# Altium PCB PSoC6-Cardiac-PCB.PcbDoc (part 1 of 2)
Units mil, origin at the board's own origin, x right, y up, seen from the top; angles counter-clockwise.
Board outline 1456 x 1820 mil, 4 copper layers (Top Layer, Layer 1, Layer 2, Bottom Layer), stack 41.656 mil thick; 58 components, 40 nets, 282 pads, 88 vias.
Unrouted connection lines stored in the file: 6.
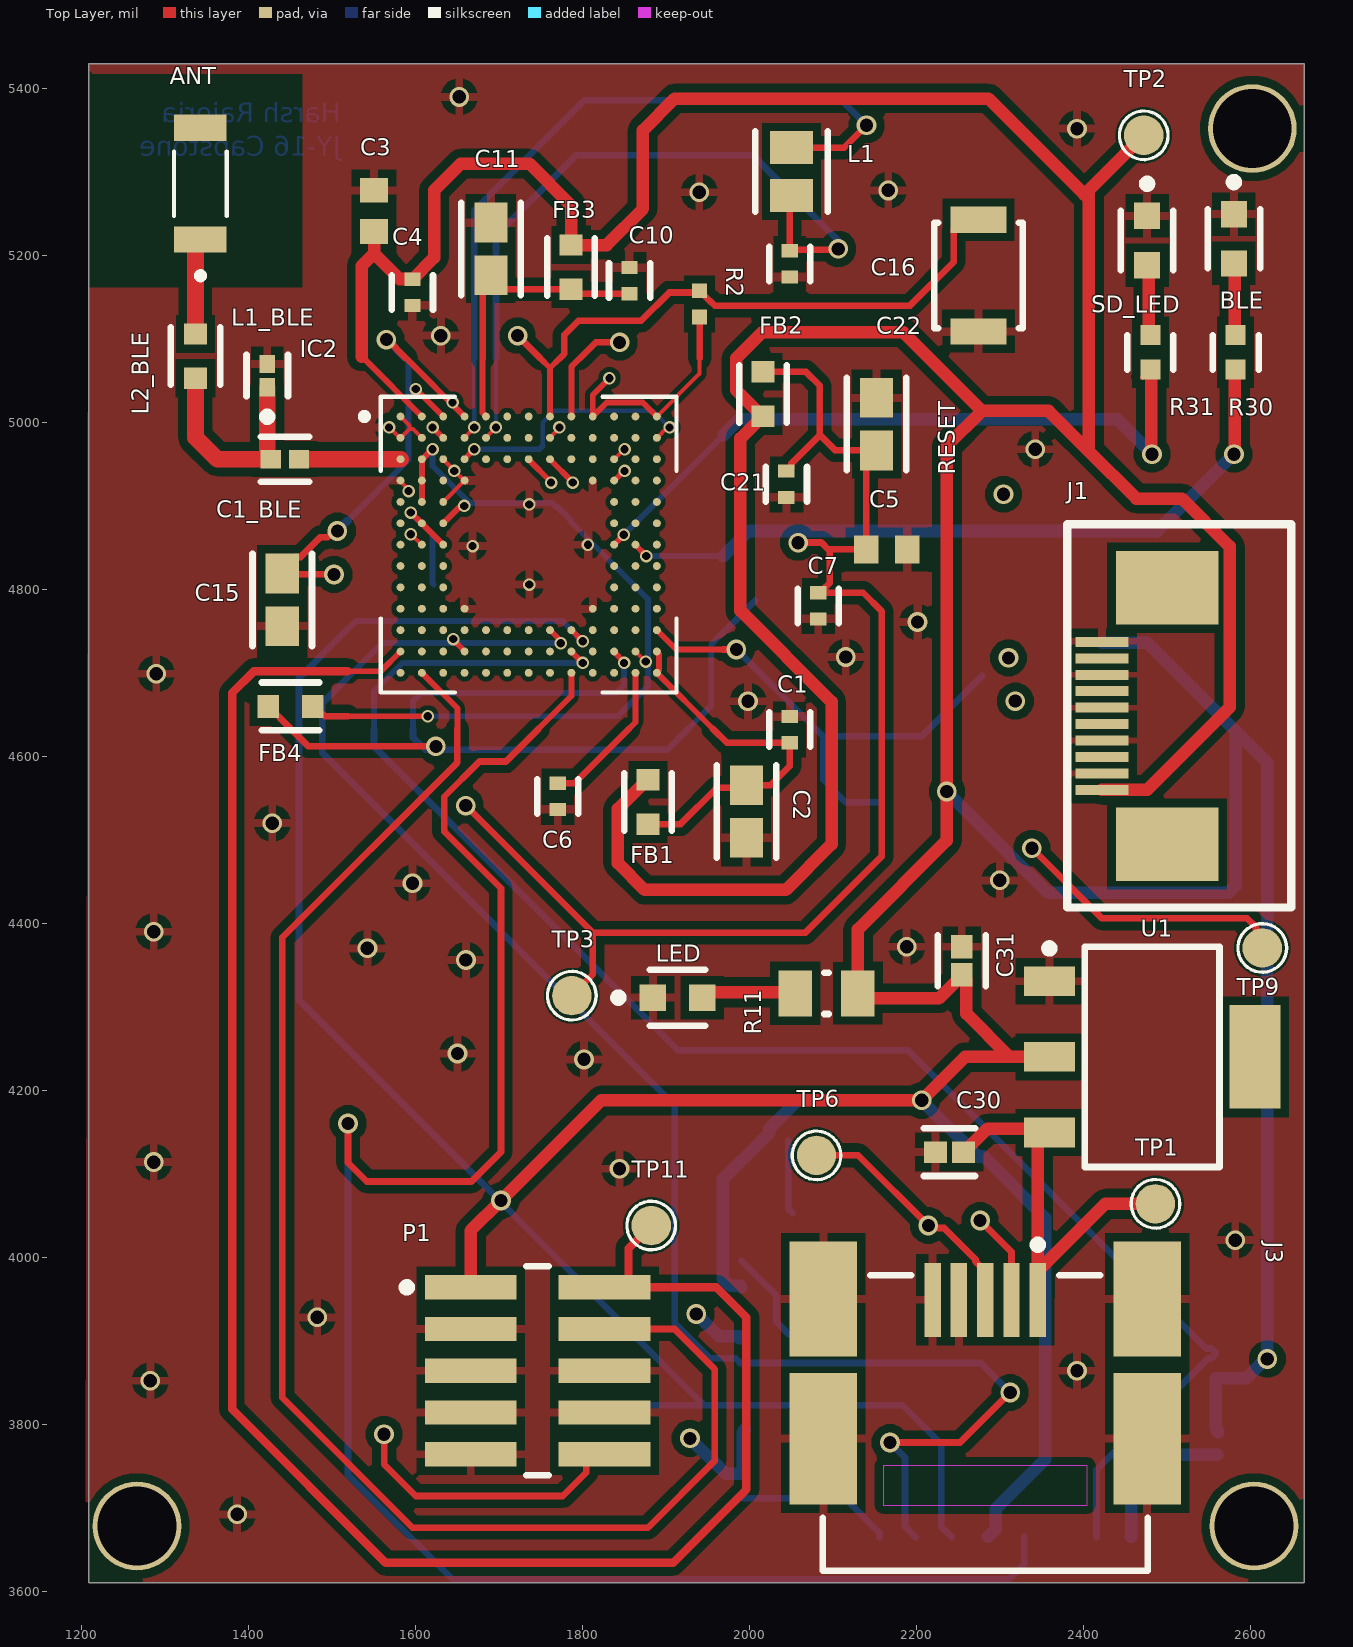
[diagram p0: Top Layer view]
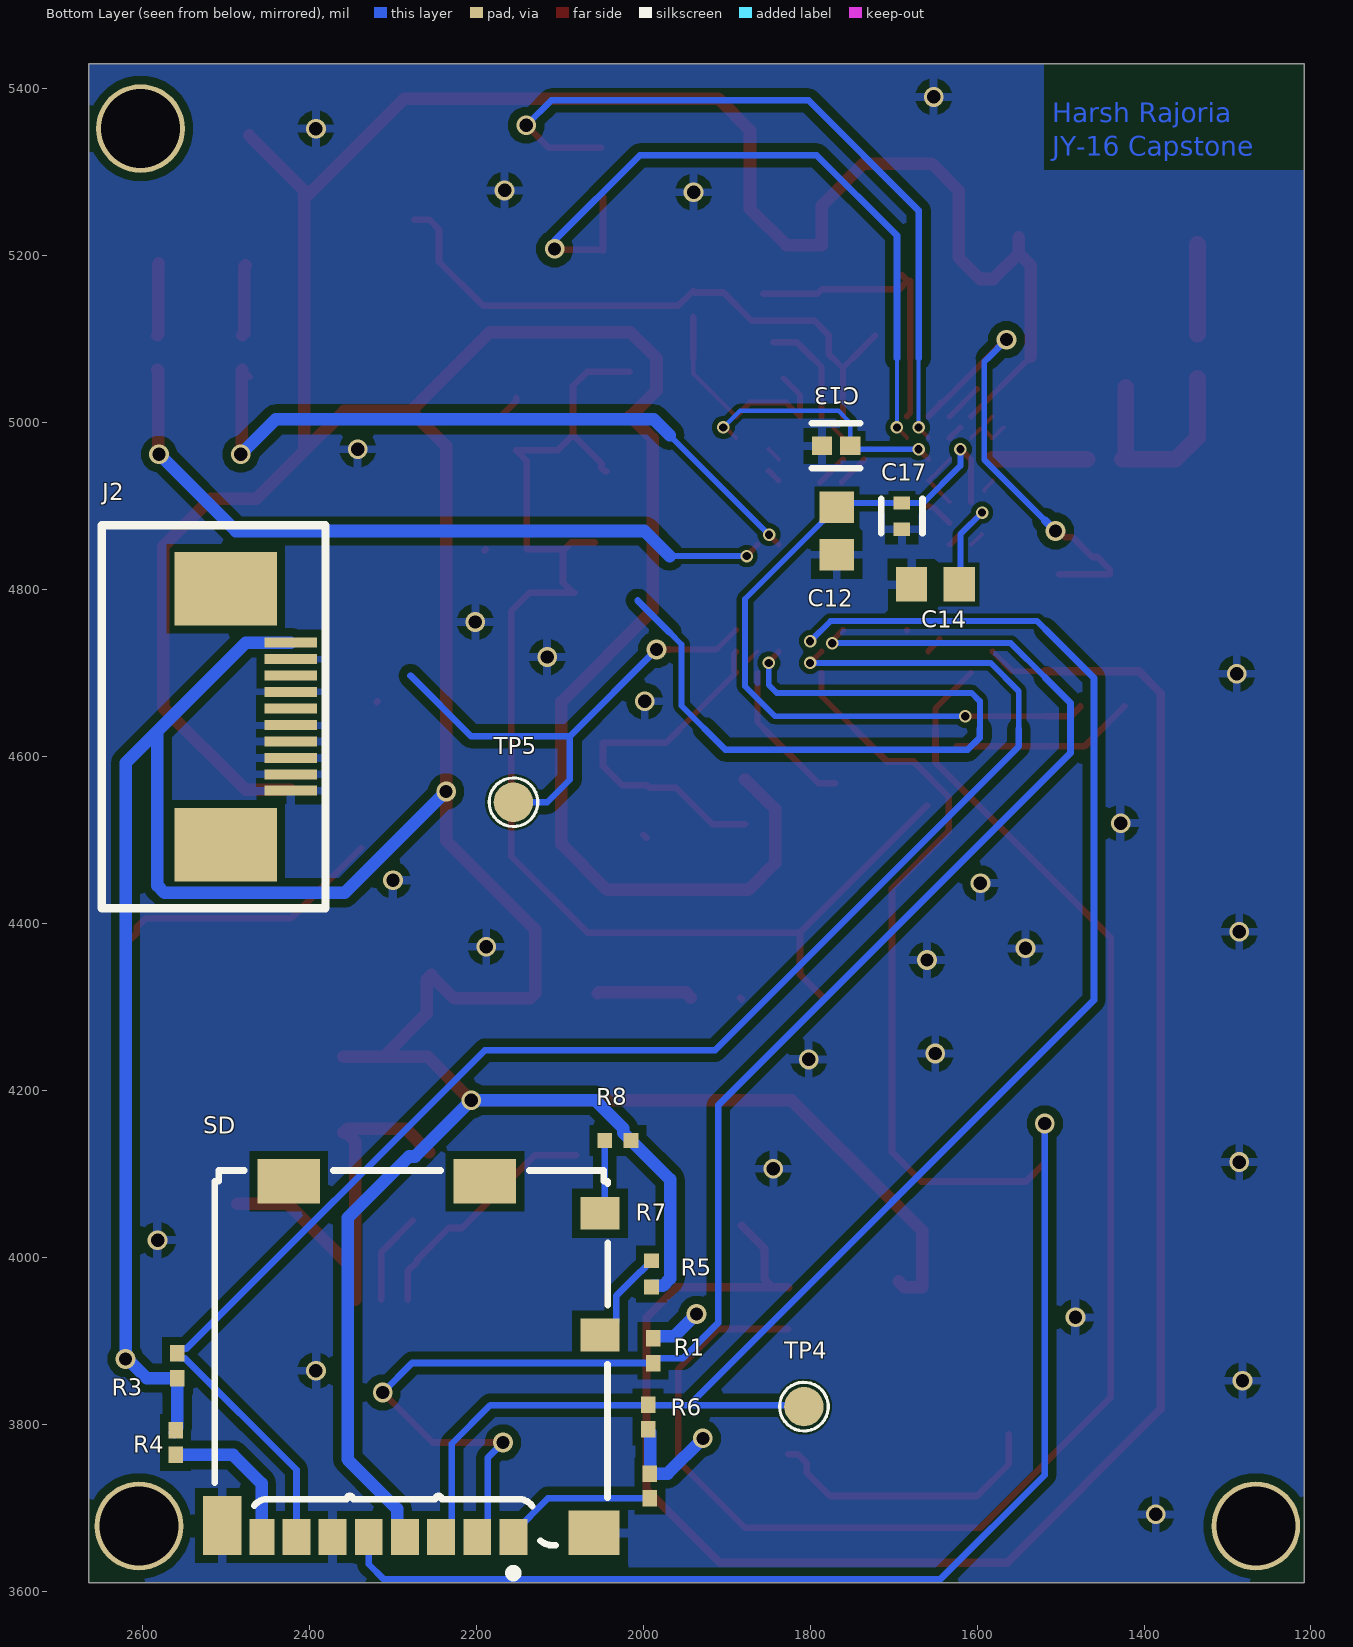
[diagram p1: Bottom Layer view, seen from below]
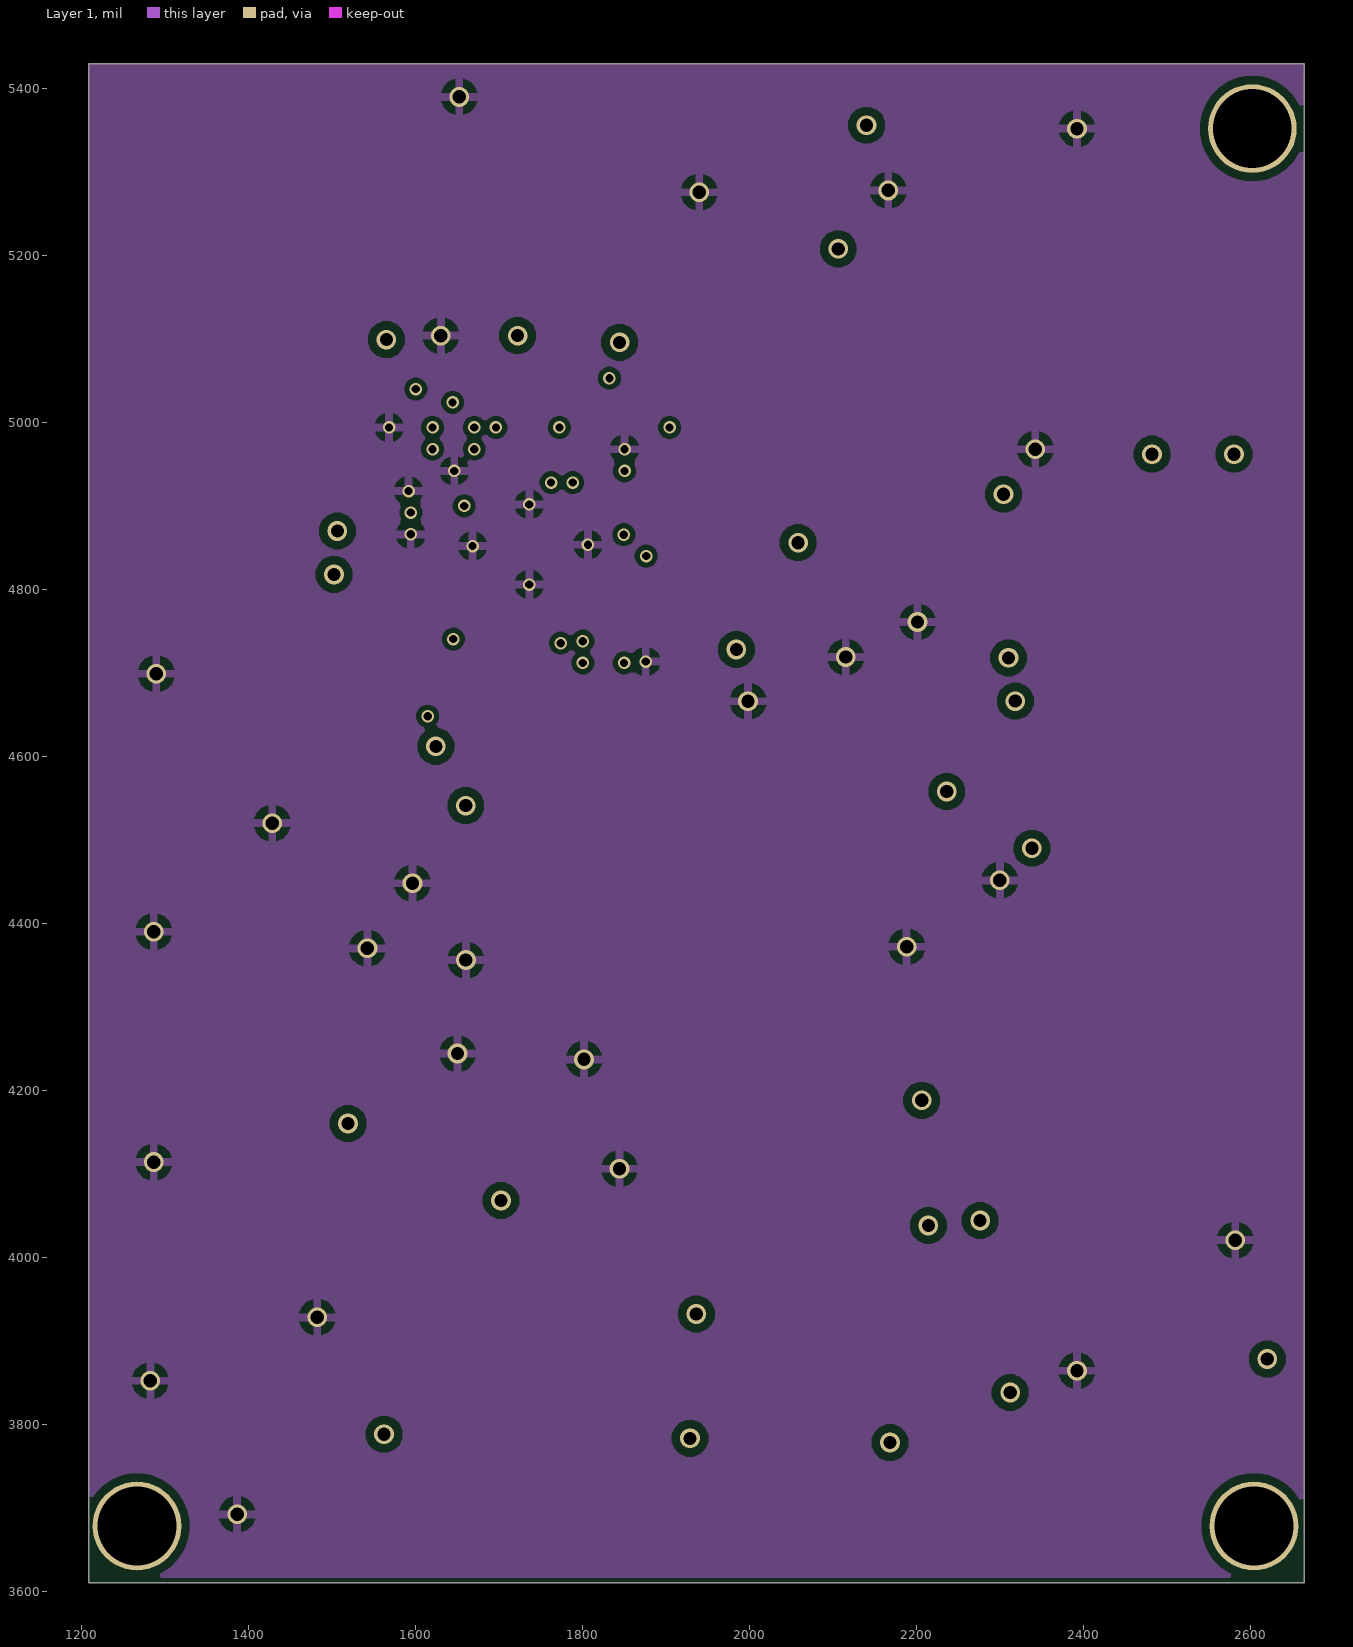
[diagram p2: Layer 1]
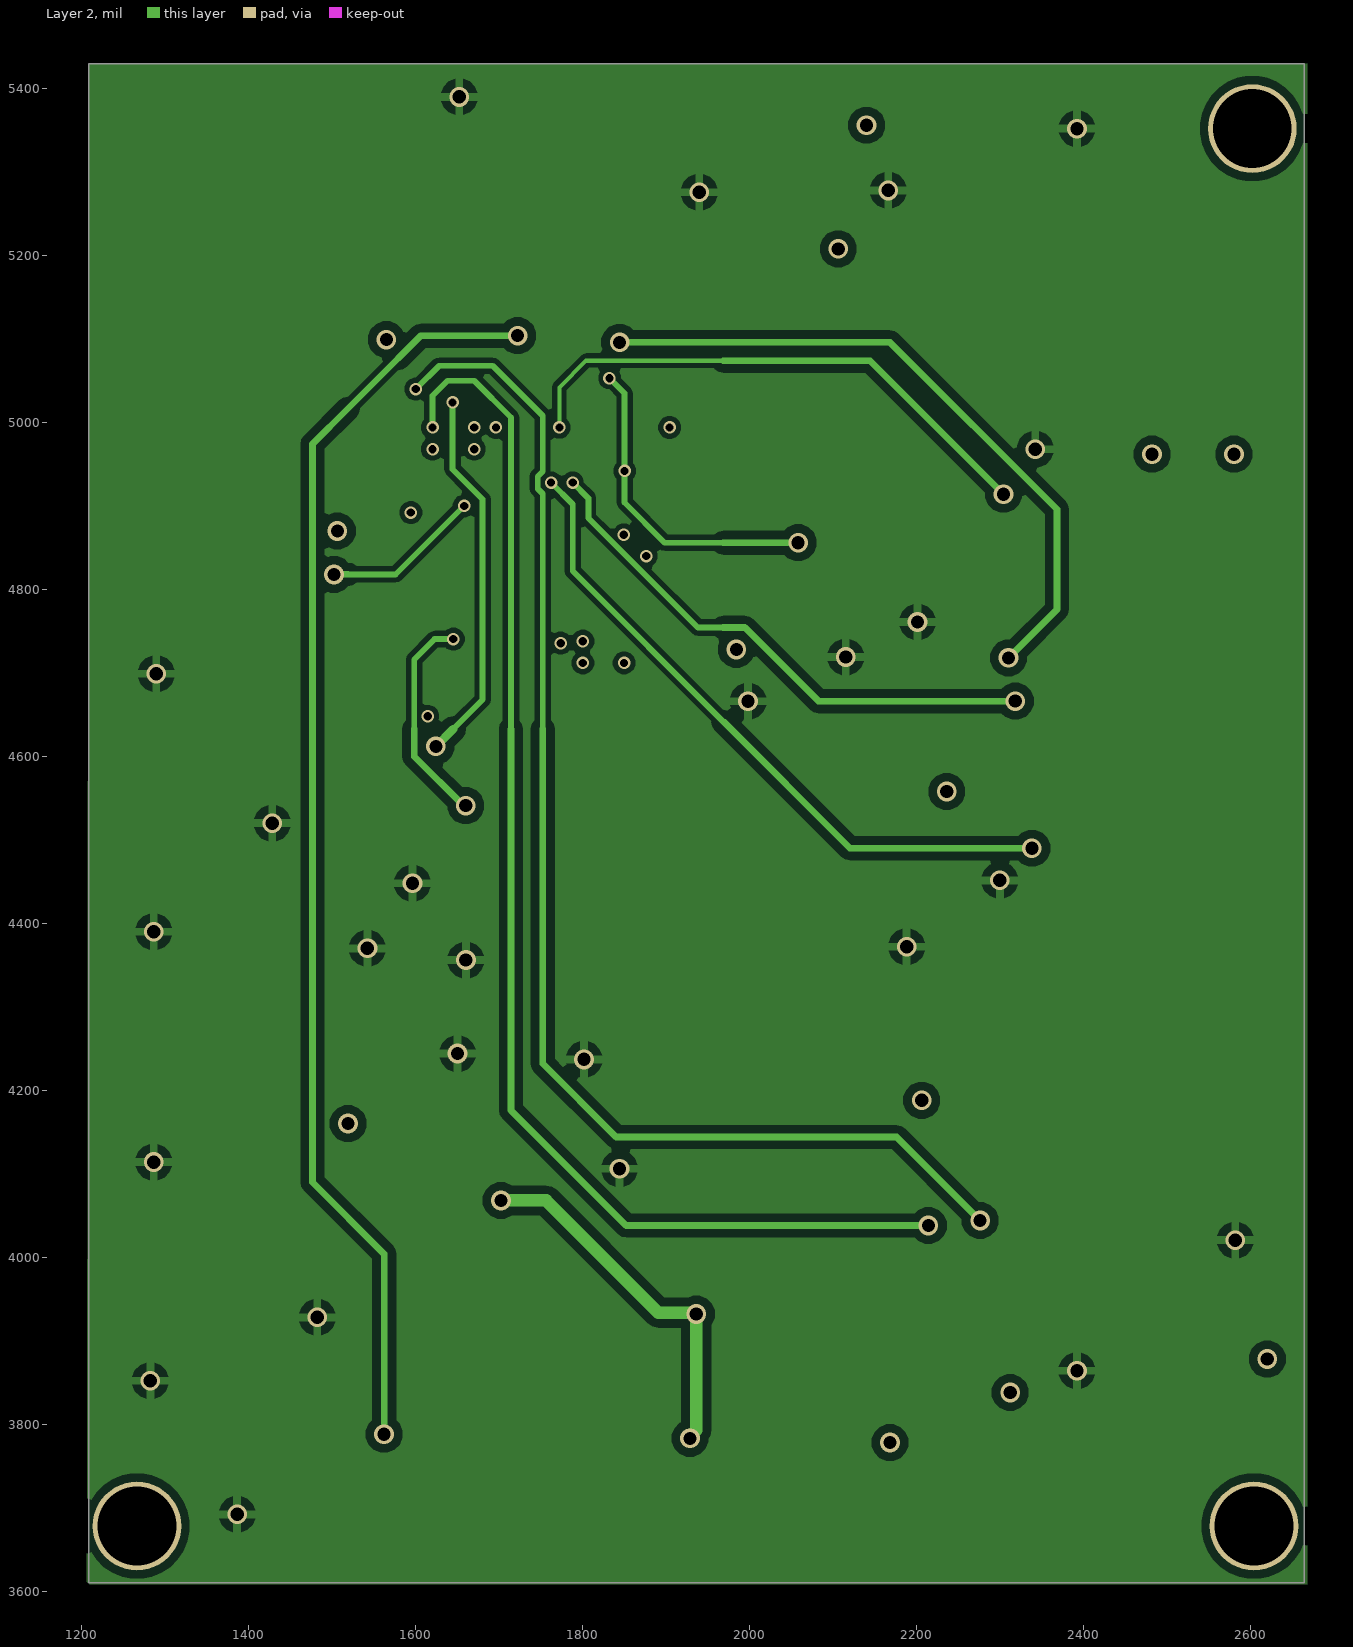
[diagram p3: Layer 2]
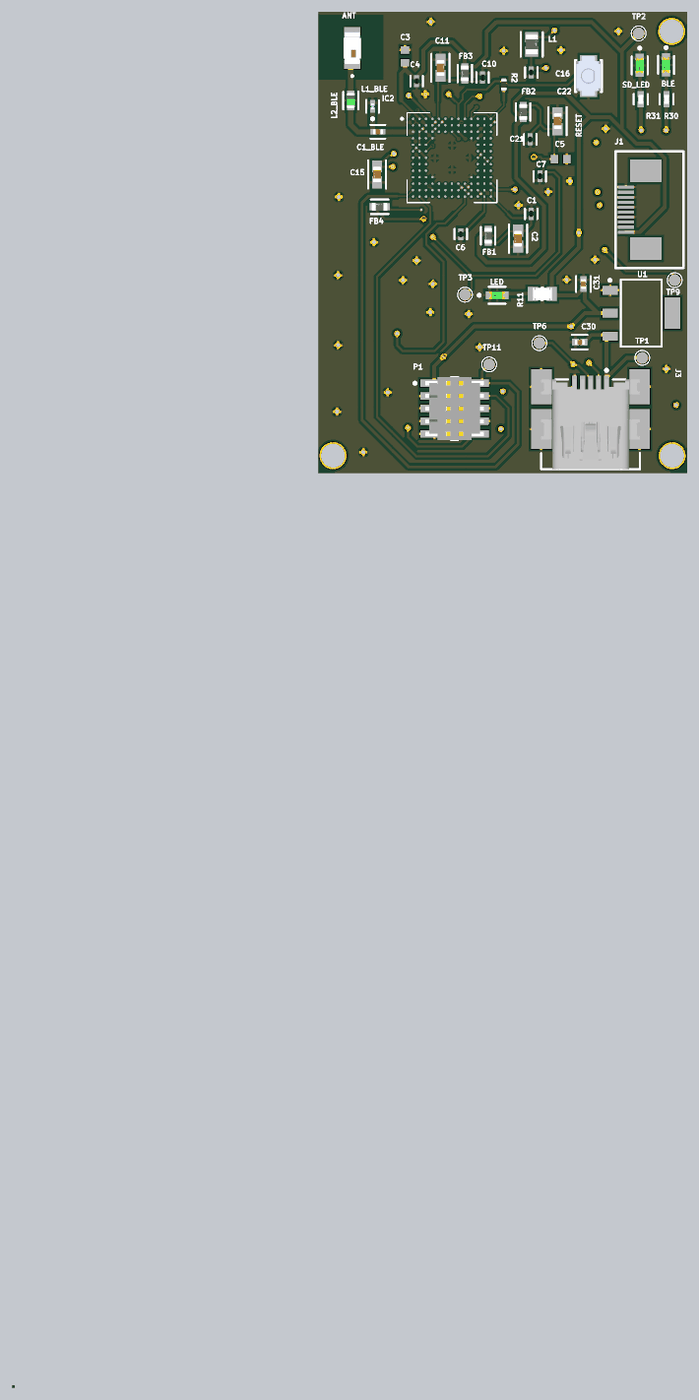
[diagram p4: 3D render of the assembled board from above, using the file's embedded part models]

## Layer stack, top to bottom
Top Solder: solder mask 0.4, Solder Resist, Dk 3.5
Top Layer: signal copper 1.4
Dielectric 2: prepreg 11.75, FR-4, Dk 4.1
Layer 1: signal copper 1.378
Dielectric 1: dielectric 12.6, FR-4, Dk 4.8
Layer 2: signal copper 1.378
Dielectric 3: prepreg 11.75, FR-4, Dk 4.1
Bottom Layer: signal copper 1.4
Bottom Solder: solder mask 0.4, Solder Resist, Dk 3.5

## Board outline
1208,3610 2664,3610 2664,5430 1208,5430
cut-out: 0,0 10,0 10,10 0,10

## Design rules (kind name [scope] priority, off if disabled: settings)
Clearance Clearance_BGA [WithinRoom('BGA')] p1: gap=5.98 ignorepadtopadclearanceinfootprint=TRUE except(0: Arc-Hole Track-Hole SMDPad-Hole THPad-Hole Via-Hole Fill-Hole Poly-Hole Region-Hole Text-Hole; 4: SMDPad-Via; 5: Arc-Via Track-Via; 6: Arc-Arc Arc-Track Track-Track; 10: THPad-THPad THPad-Via; 11: Via-Via)
Clearance [All] p2: gap=10 ignorepadtopadclearanceinfootprint=TRUE except(0: Arc-Hole Track-Hole SMDPad-Hole THPad-Hole Via-Hole Fill-Hole Poly-Hole Region-Hole Text-Hole; 6: Arc-SMDPad Track-SMDPad)
ComponentClearance [All] p1: gap=0 collisioncheckmode=3 verticalgap=0 showdistances=FALSE
PolygonConnect [All] p1: connectstyle=Relief reliefconductorwidth=10 reliefentries=4 polygonreliefangle="90 Angle" airgapwidth=10
RoomDefinition BGA [False] p1: confinementstyle=ConfineIn formatcopy=TRUE lockcomponents=FALSE outline 1518.41,5076.82 1968.41,5076.82 1968.41,4632.82 1518.41,4632.82
RoutingVias RoutingVias_BGA [WithinRoom('BGA')] p1: holewidth=9.84 width=14.96 viastyle="Through Hole" minholewidth=7.87 minwidth=11.81 maxholewidth=9.84 maxwidth=15.75
RoutingVias [All] p2: holewidth=15.75 width=23.62 viastyle="Through Hole" minholewidth=15.75 minwidth=23.62 maxholewidth=15.75 maxwidth=23.62
SolderMaskExpansion SolderMaskExpansion_BGA [WithinRoom('BGA')] p1: expansion=4 istentingtop=TRUE
SolderMaskExpansion [All] p2: expansion=4 istentingtop=FALSE
Width Width_RF [InNet('NetC1_BLE_1') or InNet('NetC1_BLE_2') or InNet('NetANT_1')] p1: maxlimit=20 minlimit=10 preferedwidth=10 toplayer_minwidth=20 toplayer_prefwidth=20 midlayer1_maxwidth=10 midlayer2_maxwidth=10 bottomlayer_maxwidth=10 minimp=50.000000 maximp=50.000000 favimp=50.000000
Width Width_BGA [WithinRoom('BGA')] p2: maxlimit=7 minlimit=5 preferedwidth=6 minimp=50.000000 maximp=50.000000 favimp=50.000000
Width Width_Power [InNet('VCC') Or InNet('VDD')] p3: maxlimit=20 minlimit=15 preferedwidth=15 minimp=50.000000 maximp=50.000000 favimp=50.000000
Width [All] p4: maxlimit=15 minlimit=8 preferedwidth=10 minimp=50.000000 maximp=50.000000 favimp=50.000000
29 further rules are at their usual default settings.

## Components (designator, comment, footprint, x,y, rotation, side; value= is the part's Value field where it differs from the comment)
ANT "2450AT18B100E" XDCR_2450AT18B100E 1342,5286 r90 top
BLE "BLE" FP-6_541-5092_01-4-MFG 2580,5220 r270 top
C1 "GRM155R71C104KA88D" FP-GRM15-MFG 2048,4632 r270 top value=0.10μF
C1_BLE "1.2pF" FP-GJM155-0_05-IPC_B 1443.13,4956 r180 top
C2 "10uF" FP-GRM188-0_1-e0_2_0_55-IPC_A 1996,4534 r270 top
C3 "GRM188R61E105KA12D" CAPC1608X90X35LL10T15 1550,5253.39 r270 top
C4 "GRM155R71C104KA88D" FP-GRM15-MFG 1596,5155.75 r90 top value=0.10μF
C5 "GRM188R61E105KA12D" CAPC1608X90X35LL10T15 2164,4848 r180 top
C6 "GRM155R71C104KA88D" FP-GRM15-MFG 1770,4552 r90 top value=0.10μF
C7 "GRM155R71C104KA88D" FP-GRM15-MFG 2082,4780.25 r90 top value=0.10μF
C10 "GRM155R71C104KA88D" FP-GRM15-MFG 1856,5170 r270 top value=0.10μF
C11 "GRM188R60J106ME47D" FP-GRM188-0_1-e0_2_0_55-IPC_A 1690,5208 r90 top
C12 "GRM188R61E105KA12D" CAPC1608X90X35ML10T15 1768,4870 r270 bottom value=1uF
C13 "GRM155R71C104KA88D" FP-GRM15-MFG 1690,4887.75 r270 bottom value=0.10μF
C14 "GRM188R61E105KA12D" CAPC1608X90X35ML10T15 1650,4806 r0 bottom value=1uF
C15 "GRM188R60J106ME47D" FP-GRM188-0_1-e0_2_0_55-IPC_A 1440,4787.57 r270 top
C16 "GRM155R71C104KA88D" FP-GRM15-MFG 2048,5190 r270 top value=0.10μF
C17 "GRM155R60J475ME47D" FP-GRM155-0_1-IPC_B 1768.87,4972 r180 bottom
C21 "0.1uF" FP-GRM15-MFG 2044,4926 r90 top value=0.10μF
C22 "10uF" FP-GRM188-0_1-e0_2_0_55-IPC_A 2152,4998 r90 top
C30 "10uF" FP-GRM155-0_15-IPC_B 2239.19,4126 r180 top
C31 "10uF" FP-GRM155-0_15-IPC_B 2254,4355.19 r90 top
FB1 "BLM18HE102SN1D" FP-BLM18-0_15-t0_8-MFG 1878,4545.43 r270 top
FB2 "BLM18HE102SN1D" FP-BLM18-0_15-t0_8-MFG 2016,5034 r270 top
FB3 "BLM18HE102SN1D" FP-BLM18-0_15-t0_8-MFG 1786,5186 r270 top
FB4 "BLM18HE102SN1D" FP-BLM18-0_15-t0_8-MFG 1450,4660 r180 top
IC2 "CY8C6347BZI-BLD54" BGAS124C65P13X13_900X900X100 1735.18,4853.64 r0 top locked
J1 "IMU FFC" ZF5S-10-01-X-WT 2422,4648.5 r90 top
J2 "PPG FFC" ZF5S-10-01-X-WT 2422,4647.5 r270 bottom
J3 "56579-0576" MOLX-56579-0576_V 2282.1,3949.02 r0 top
L1 "2.2uH" FP-LQM21PH_G0-IPC_C 2050,5300.59 r90 top
L1_BLE "2.7nH" FP-LQP03TG_02-IPC_A 1422,5056.05 r90 top
L2_BLE "3.3nH" FP-LQG18HH_00-MFG 1336,5079.43 r270 top
LED "LTST-C190GKT" FP-LTST-C190GKT-MFG 1913.47,4311 r0 top
P1 "FTSH-105-01-F-DV-K" SMTC-FTSH-105-01-L-DV-K_V 1745.88,3864 r270 top
R1 "10k" RESC1005X40X25LL05T10 1994,3808.76 r270 bottom
R2 "4.7k" RESC1005X40X25LL05T05 1940,5142 r270 top
R3 "10k" RESC1005X40X25LL05T10 2558,3870 r270 bottom
R4 "10k" RESC1005X40X25LL05T10 2560,3778 r90 bottom
R5 "10k" RESC1005X40X25LL05T10 1988,3888 r90 bottom
R6 "10k" RESC1005X40X25LL05T10 1992,3726 r90 bottom
R7 "4.7k" RESC1005X40X25LL05T05 1990,3980 r270 bottom
R8 "4.7k" RESC1005X40X25LL05T05 2030.25,4140 r180 bottom
R11 "CRCW08052K00FKEA" FP-CRCW0805-e3-IPC_B 2092,4316 r0 top
R30 "470" FP-CRCW0402-e3-MFG 2582,5084 r90 top
R31 "470" FP-CRCW0402-e3-MFG 2480,5084 r90 top
RESET "B3U-1000P" FP-B3U-1000P-MFG 2274,5176 r270 top (schematic designator SW1)
SD "104031-0811" MOLX-104031-0811_V 2278,3878 r180 bottom
SD_LED "SD" FP-6_541-5092_01-4-MFG 2476,5218 r270 top
TP1 "TestPoint" TestPoint 2486,4064 r0 top
TP2 "TestPoint" TestPoint 2472,5344 r0 top
TP3 "TestPoint" TestPoint 1786.9,4313.36 r0 top
TP4 "TestPoint" TestPoint 1807.36,3821.1 r180 bottom
TP5 "TestPoint" TestPoint 2155.36,4545.1 r180 bottom
TP6 "TestPoint" TestPoint 2080,4122 r0 top
TP9 "TestPoint" TestPoint 2614,4370.5 r0 top
TP11 "TestPoint" TestPoint 1882,4038 r0 top
U1 "ADP3338AKCZ-3.3-RL" ADI-KC-3_L 2482,4240 r0 top

## Footprints (in the part's own frame and the unit in brackets; to place one, negate y for a bottom-side part, rotate by r counter-clockwise, add the part's x,y. Pads: shape width x height; smd on the part's side, far side on the other; paste and mask are expansions set on the pad)
ADI-KC-3_L [mm] "SOT223, 4-Leads, Body 6.5x3.5mm, Pitch 2.3mm, IPC High Density"
  rect 1.55x0.9 smd: 1(-3.125,2.3) 2(-3.125,0) 3(-3.125,-2.3)
  rect 1.55x3.15 smd: 4(3.125,0)
  silkscreen extent -3.25,-3.35 2.05,3.42, body extent -1.85,-3.35 1.85,3.35, height 1.8
BGAS124C65P13X13_900X900X100 [mm]
  round 0.24 smd: A1(-3.9,3.9) A2(-3.25,3.9) A3(-2.6,3.9) A4(-1.95,3.9) A5(-1.3,3.9) A6(-0.65,3.9) A7(0,3.9) A8(0.65,3.9) A9(1.3,3.9) A10(1.95,3.9) A11(2.6,3.9) A12(3.25,3.9) A13(3.9,3.9) B1(-3.9,3.25) B2(-3.25,3.25) B3(-2.6,3.25) B4(-1.95,3.25) B5(-1.3,3.25) B6(-0.65,3.25) B7(0,3.25) B8(0.65,3.25) B9(1.3,3.25) B10(1.95,3.25) B11(2.6,3.25) B12(3.25,3.25) B13(3.9,3.25) C1(-3.9,2.6) C2(-3.25,2.6) C3(-2.6,2.6) C4(-1.95,2.6) C5(-1.3,2.6) C6(-0.65,2.6) C7(0,2.6) C8(0.65,2.6) C9(1.3,2.6) C10(1.95,2.6) C11(2.6,2.6) C12(3.25,2.6) C13(3.9,2.6) D1(-3.9,1.95) D2(-3.25,1.95) D3(-2.6,1.95) D4(-1.95,1.95) D10(1.95,1.95) D11(2.6,1.95) D12(3.25,1.95) D13(3.9,1.95) E1(-3.9,1.3) E2(-3.25,1.3) E3(-2.6,1.3) E11(2.6,1.3) E12(3.25,1.3) E13(3.9,1.3) F1(-3.9,0.65) F2(-3.25,0.65) F3(-2.6,0.65) F11(2.6,0.65) F12(3.25,0.65) F13(3.9,0.65) G1(-3.9,0) G2(-3.25,0) G3(-2.6,0) G11(2.6,0) G12(3.25,0) G13(3.9,0) H1(-3.9,-0.65) H2(-3.25,-0.65) H3(-2.6,-0.65) H11(2.6,-0.65) H12(3.25,-0.65) H13(3.9,-0.65) J1(-3.9,-1.3) J2(-3.25,-1.3) J3(-2.6,-1.3) J11(2.6,-1.3) J12(3.25,-1.3) J13(3.9,-1.3) K1(-3.9,-1.95) K2(-3.25,-1.95) K3(-2.6,-1.95) K4(-1.95,-1.95) K10(1.95,-1.95) K11(2.6,-1.95) K12(3.25,-1.95) K13(3.9,-1.95) L1(-3.9,-2.6) L2(-3.25,-2.6) L3(-2.6,-2.6) L4(-1.95,-2.6) L5(-1.3,-2.6) L6(-0.65,-2.6) L7(0,-2.6) L8(0.65,-2.6) L9(1.3,-2.6) L10(1.95,-2.6) L11(2.6,-2.6) L12(3.25,-2.6) L13(3.9,-2.6) M1(-3.9,-3.25) M2(-3.25,-3.25) M3(-2.6,-3.25) M4(-1.95,-3.25) M5(-1.3,-3.25) M6(-0.65,-3.25) M7(0,-3.25) M8(0.65,-3.25) M9(1.3,-3.25) M10(1.95,-3.25) M11(2.6,-3.25) M12(3.25,-3.25) M13(3.9,-3.25) N1(-3.9,-3.9) N2(-3.25,-3.9) N3(-2.6,-3.9) N4(-1.95,-3.9) N5(-1.3,-3.9) N6(-0.65,-3.9) N7(0,-3.9) N8(0.65,-3.9) N9(1.3,-3.9) N10(1.95,-3.9) N11(2.6,-3.9) N12(3.25,-3.9) N13(3.9,-3.9)
  silkscreen extent -5.1,-4.5 4.5,4.5
CAPC1608X90X35LL10T15 [mm] "Chip Capacitor, 2-Leads, Body 1.60x0.80mm, IPC High Density"
  rect 0.75x0.85 smd: 1(-0.625,0) 2(0.625,0)
  body extent -0.85,-0.45 0.85,0.45, height 0.9
CAPC1608X90X35ML10T15 [mm] "Chip Capacitor, 2-Leads, Body 1.60x0.80mm, IPC Low Density"
  rect 0.95x1.05 smd: 1(-0.725,0) 2(0.725,0)
  body extent -0.85,-0.45 0.85,0.45, height 0.9
FP-6_541-5092_01-4-MFG [mm]
  rect 0.8x0.8 smd paste+0 mask+0: 1(-0.75,0) 2(0.75,0)
  silkscreen extent -1.85,-0.8 0.9,0.8, body extent -1.25,-0.6 1.25,0.6, height 0.25
FP-B3U-1000P-MFG [mm]
  rect 0.8x1.7 smd paste+0 mask+0: 1(-1.7,0) 2(1.7,0)
  silkscreen extent -1.6,-1.35 1.6,1.35, body extent -2.2,-1.45 2.2,1.45, height 0.25
FP-BLM18-0_15-t0_8-MFG [mm]
  rect 0.65x0.7 smd paste+0 mask+0: 1(-0.675,0) 2(0.675,0)
  silkscreen extent -0.87,-0.72 0.87,0.72, body extent -1.1,-0.58 1.1,0.58, height 0.25
FP-CRCW0402-e3-MFG [mm]
  rect 0.6x0.6 smd paste+0 mask+0: 1(-0.525,0) 2(0.525,0)
  silkscreen extent -0.53,-0.7 0.53,0.7, body extent -0.92,-0.4 0.92,0.4, height 0.25
FP-CRCW0805-e3-IPC_B [mil]
  rect 39.63x55.44 smd paste+0 mask+0: 1(-37.44,0) 2(37.44,0)
  silkscreen extent -3,-25 3,25, body extent -67,-38 67,38, height 10
FP-GJM155-0_05-IPC_B [mil]
  rect 24.23x22.54 smd paste+0 mask+0: 1(-16.87,0) 2(16.87,0)
  silkscreen extent -29,-27 29,27, body extent -35,-17 35,17, height 10
FP-GRM15-MFG [mm]
  rect 0.4x0.5 smd paste+0 mask+0: 1(-0.4,0) 2(0.4,0)
  silkscreen extent -0.53,-0.63 0.53,0.63, body extent -0.7,-0.38 0.7,0.38, height 0.25
FP-GRM155-0_1-IPC_B [mil]
  rect 24.23x22.54 smd paste+0 mask+0: 1(-16.87,0) 2(16.87,0)
  silkscreen extent -29,-27 29,27, body extent -20,-10 20,10, height 24
FP-GRM155-0_15-IPC_B [mil]
  rect 27.72x25.91 smd paste+0 mask+0: 1(-16.81,0) 2(16.81,0)
  silkscreen extent -31,-29 31,29, body extent -37,-19 37,19, height 10
FP-GRM188-0_1-e0_2_0_55-IPC_A [mil]
  rect 47.57x39.85 smd paste+0 mask+0: 1(-31.57,0) 2(31.57,0)
  silkscreen extent -55,-36 55,36, body extent -75,-40 75,40, height 10
FP-LQG18HH_00-MFG [mm]
  rect 0.65x0.7 smd paste+0 mask+0: 1(-0.675,0) 2(0.675,0)
  silkscreen extent -0.87,-0.75 0.87,0.75, body extent -1.1,-0.58 1.1,0.58, height 0.25
FP-LQM21PH_G0-IPC_C [mil]
  rect 39.61x51.5 smd paste+0 mask+0: 1(-28.59,0) 2(28.59,0)
  silkscreen extent -48,-43 48,43, body extent -52,-31 52,31, height 10
FP-LQP03TG_02-IPC_A [mil]
  rect 21.82x18.22 smd paste+0 mask+0: 1(-13.95,0) 2(13.95,0)
  silkscreen extent -54,-25 25,25, body extent -33,-17 33,17, height 10
FP-LTST-C190GKT-MFG [mm]
  rect 0.8x0.8 smd paste+0 mask+0: 1(-0.75,0) 2(0.75,0)
  silkscreen extent -1.92,-0.85 0.85,0.85, body extent -1.25,-0.55 1.25,0.55, height 0.25
MOLX-56579-0576_V [mm] "SMD, 5-Leads, body 9.9x9mm, Pitch 0.8mm"
  rect 0.5x2.25 smd: 1(1.6,0) 2(0.8,0) 3(0,0) 4(-0.8,0) 5(-1.6,0)
  rect 2.05x3.5 smd: 6(4.925,0.025) 7(-4.925,0.025)
  rect 2.05x4 smd: 8(4.925,-4.225) 9(-4.925,-4.225)
  Top Layer keep-out region: -3.1,-6.25 3.1,-6.25 3.1,-5.05 -3.1,-5.05
  silkscreen extent -4.95,-8.25 4.95,1.8, body extent -4.95,-8.25 4.95,0.75, height 3.93
MOLX-104031-0811_V [mm] "Micro SD, 8-Leads, Body 11.95x11.4mm, Pitch 1.1mm"
  rect 0.85x1.1 smd: 1(3.113,-5.412) 2(2.013,-5.412) 3(0.913,-5.412) 4(-0.188,-5.412) 5(-1.288,-5.412) 6(-2.387,-5.412) 7(-3.487,-5.412)
  rect 0.75x1.1 smd: 8(-4.537,-5.412)
  rect 1.2x1 smd: 9(5.748,0.738) 10(5.748,4.438)
  rect 1.55x1.35 smd: 11(5.573,-5.287)
  rect 1.17x1.8 smd: 12(-5.747,-5.062)
  rect 1.9x1.35 smd: 13(-3.722,5.413) 14(2.248,5.413)
  silkscreen extent -5.97,-6.64 5.98,5.74, body extent -5.97,-5.66 5.98,5.74, height 1.45
RESC1005X40X25LL05T05 [mm] "Chip Resistor, 2-Leads, Body 1.05x0.55mm, IPC High Density"
  rect 0.45x0.45 smd: 1(-0.4,0) 2(0.4,0)
  body extent -0.53,-0.28 0.53,0.28, height 0.4
RESC1005X40X25LL05T10 [mm] "Chip Resistor, 2-Leads, Body 1.00x0.50mm, IPC High Density"
  rect 0.5x0.45 smd: 1(-0.375,0) 2(0.375,0)
  body extent -0.53,-0.27 0.53,0.28, height 0.4
SMTC-FTSH-105-01-L-DV-K_V [mm] "CONN, 10-Leads, Body 6.35x3.43mm, Pitch 1.27mm"
  rect 0.74x2.79 smd: 1(-2.54,-2.035) 2(-2.54,2.035) 3(-1.27,-2.035) 4(-1.27,2.035) 5(0,-2.035) 6(0,2.035) 7(1.27,-2.035) 8(1.27,2.035) 9(2.54,-2.035) 10(2.54,2.035)
  silkscreen extent -3.17,-4.1 3.17,0.34, body extent -3.17,-2.92 3.18,2.92, height 6.12
TestPoint [mm]
  round 1.2 smd paste-0.015: TP?(0,0)
  silkscreen extent -0.74,-0.74 0.74,0.74, body extent -0.6,-0.6 0.6,0.6, height 0.03
XDCR_2450AT18B100E [mm]
  rect 0.8x1.6 smd: 1(-1.7,0) 2(1.7,0)
  silkscreen extent -2.9,-0.8 0.98,0.8, body extent -1.6,-0.8 1.6,0.8, height 0.7
ZF5S-10-01-X-WT [mil]
  rect 12x63 smd mask+2: 1(-88.65,0) 2(-68.95,0) 3(-49.25,0) 4(-29.55,0) 5(-9.85,0) 6(9.85,0) 7(29.55,0) 8(49.25,0) 9(68.95,0) 10(88.65,0)
  rect 88x123 smd mask+2: G1(-153.5,-78) G2(153.5,-78)
  silkscreen extent -230,-226 230,42

## Part data
ANT: "2.4GHz - Chip RF Antenna 2.4GHz ~ 2.5GHz 0.5dBi Solder Surface Mount", Package=None, Availability="In Stock", Check_prices=https://www.snapeda.com/parts/2450AT18B100E/Johanson+Technology+Inc./view-part/?ref=eda, MF="Johanson Technology", MP=2450AT18B100E, Price=None, Purchase-URL=https://pricing.snapeda.com/search/part/2450AT18B100E/?ref=eda, SnapEDA_Link=https://www.snapeda.com/parts/2450AT18B100E/Johanson+Technology+Inc./view-part/?ref=snap
BLE: library part CMP-02520-000011-1, "LED GREEN 0603 SMD", Ambient Temperature Range High=+85°C, Ambient Temperature Range Low=-35°C, Colour="Yellow Green", Forward Current=20mA, Forward Voltage=2V, Manufacturer=Vishay, Manufacturer Part Number=VLMG1300-GS08, Package=6.541-5092.01-4, Power Dissipation=75mW, Reverse Voltage=5V, Temperature="-35°C to +85°C", Automotive=No, Category=Diode, ComponentLink2Description=Datasheet, ComponentLink2URL=http://www.vishay.com/docs/82437/vlmo1300.pdf, Device Class L1=Optoelectronics, Device Class L2=LEDs, Device Class L3=unset, Digikey Description="LED GREEN 0603 SMD", Height=1mm, Lead Free=Yes, Led Orientation="Top View", Luminous Intensity=35mcd, Mouser Description="LED; SMD; 0603; yellow green; 18-35mcd; 1.6x0.8x0.8mm; 130°; 2÷2.4V", Octopart=https://octopart.com/vlmg1300-gs08-vishay-21709199, Peak Emmision Wavelength=574nm, RoHS=TRUE, Temperature Range High=+85°C, Temperature Range Low=-35°C, Viewing Angle=130°, Wavelength=571nm
C1 C4 C6 C7 C10 C13 C16: library part CMP-2100-03641-2, "CAP CER 0.1UF 16V X7R 0402", Capacitance=0.10μF, Manufacturer=Murata, Package=GRM15, Temperature="-55°C to +125°C", Temperature Characteristic=X7R, Temperature Range High=+125°C, Temperature Range Low=-55°C, Tolerance=10%, Voltage Rating=16Vdc, Category=Cap, ComponentLink2Description=Datasheet, ComponentLink2URL=https://search.murata.co.jp/Ceramy/image/img/A01X/G101/ENG/GRM155R71H471KA01-01A.pdf, Device Class L1="Passive Components", Device Class L2=Capacitors, Device Class L3="Ceramic Capacitors", Digikey Description="CAP CER 0.1UF 16V X7R 0402", Height=0.55mm, Ipc Land Pattern Name=CAPC10050X219, Lead Free=yes, Manufacturer Part Number=GRM155R71C104KA88D, Material=Ceramic, Mouser Description="0402 0.1 uF 16V ±10 % Tolerance X7R SMT Multilayer Ceramic Capacitor", Octopart=https://octopart.com/grm155r71c104ka88d-murata-196880, RoHS=TRUE, Standoff Height=0mm
C1_BLE: library part CMP-2008-03813-2, "Multi-Layer Ceramic Capacitor 1.2pF C0G  ±0.1pF 0402 Paper T/R", Case Code (Imperial)=0402, Case Code (Metric)=1005, Dielectric=C0G, Max Operating Temperature=125°C, Min Operating Temperature=-55°C, Package Quantity=10000, Temperature Coefficient=30ppm/°C, Voltage=50V, Capacitance=1.2pF, Case/Package=0402, Depth=0.5mm, Height=0.5mm, Lead Free="Lead Free", Lead Pitch=0.3mm, Length=1mm, Mount="Surface Mount", Number of Pins=2, Packaging="Tape and Reel", Radiation Hardening=No, REACH SVHC="No SVHC", Termination=SMD/SMT, Thickness=0.022inch, Voltage Rating=50V, Voltage Rating (DC)=50V, Weight=2.3E-05oz, Width=0.5mm
C2 C22: library part CMP-2006-02792-2, "Chip Multilayer Ceramic Capacitors for General Purpose, 0603, 10uF, X5R, 15%, 20%, 6.3V", Case Code (Imperial)=0603, Case Code (Metric)=1608, Dielectric=X5R, Max Operating Temperature=85°C, Min Operating Temperature=-55°C, Package Quantity=4000, Tolerance=20%, Voltage=6.3V, Capacitance=10uF, Case/Package=0603, Depth=0.8mm, Height=0.8mm, Lead Free="Lead Free", Length=1.6mm, Material=Ceramic, Mount="Surface Mount", Packaging="Tape and Reel", Radiation Hardening=No, REACH SVHC="No SVHC", Termination=SMD/SMT, Thickness=0.035inch, Voltage Rating=6.3V, Voltage Rating (DC)=6.3V, Width=0.031inch
C3 C5 C12 C14: library part CMP-2006-02459-1, Manufacturer=Murata, Part Number=GRM188R61E105KA12D
C11 C15: library part CMP-2006-02792-2, "Chip Multilayer Ceramic Capacitors for General Purpose, 0603, 10uF, X5R, 15%, 20%, 6.3V", Capacitance=10uF, Case Code (Imperial)=0603, Case Code (Metric)=1608, Dielectric=X5R, Max Operating Temperature=85°C, Min Operating Temperature=-55°C, Package Quantity=4000, Tolerance=20%, Voltage=6.3V, Case/Package=0603, Depth=0.8mm, Height=0.8mm, Lead Free="Lead Free", Length=1.6mm, Material=Ceramic, Mount="Surface Mount", Packaging="Tape and Reel", Radiation Hardening=No, REACH SVHC="No SVHC", Termination=SMD/SMT, Thickness=0.035inch, Voltage Rating=6.3V, Voltage Rating (DC)=6.3V, Width=0.031inch
C17: library part CMP-2008-04549-2, "Chip Multilayer Ceramic Capacitors for General Purpose, 0402, 4.7uF, X5R, 15%, 20%, 6.3V", Capacitance=4.7uF, Case Code (Imperial)=0402, Case Code (Metric)=1005, Dielectric=X5R, Max Operating Temperature=85°C, Min Operating Temperature=-55°C, Package Quantity=10000, Tolerance=20%, Voltage=6.3V, Case/Package=0402, Contact Plating=Tin, Depth=0.5mm, Height=0.5mm, Lead Free="Lead Free", Length=1mm, Mount="Surface Mount", Packaging="Tape and Reel", REACH SVHC="No SVHC", Termination=SMD/SMT, Thickness=0.022inch, Voltage Rating=6.3V, Voltage Rating (DC)=6.3V, Weight=0.000212oz, Width=0.02inch
C21: library part CMP-2100-03641-2, "CAP CER 0.1UF 16V X7R 0402", Capacitance=0.10μF, Manufacturer=Murata, Manufacturer Part Number=GRM155R71C104KA88D, Package=GRM15, Temperature="-55°C to +125°C", Temperature Characteristic=X7R, Temperature Range High=+125°C, Temperature Range Low=-55°C, Tolerance=10%, Voltage Rating=16Vdc, Category=Cap, ComponentLink2Description=Datasheet, ComponentLink2URL=https://search.murata.co.jp/Ceramy/image/img/A01X/G101/ENG/GRM155R71H471KA01-01A.pdf, Device Class L1="Passive Components", Device Class L2=Capacitors, Device Class L3="Ceramic Capacitors", Digikey Description="CAP CER 0.1UF 16V X7R 0402", Height=0.55mm, Ipc Land Pattern Name=CAPC10050X219, Lead Free=yes, Material=Ceramic, Mouser Description="0402 0.1 uF 16V ±10 % Tolerance X7R SMT Multilayer Ceramic Capacitor", Octopart=https://octopart.com/grm155r71c104ka88d-murata-196880, RoHS=TRUE, Standoff Height=0mm
C30 C31: library part CMP-06035-012416-1, "GRM155R60J106ME15D / Chip Multilayer Ceramic Capacitors for General Purpose, 0402, 10uF, X5R, 15%, 20%, 6.3V", Case Code (Imperial)=0402, Case Code (Metric)=1005, Dielectric=X5R, Max Operating Temperature=85°C, Min Operating Temperature=-55°C, Tolerance=20%, Voltage Rating=6.3V, Capacitance=10uF, Case/Package=0402, Length=0.039inch, Mount="Surface Mount", Packaging="Tape and Reel", Thickness=0.026inch, Voltage Rating (DC)=6.3V, Width=0.02inch
FB1 FB2 FB3 FB4: library part CMP-0686-00363-3, "Chip Ferrite Bead, 0603, 1000Ω @ 100MHz, 0.35Ω, 25%, 600mA", Case Code (Imperial)=0603, Case Code (Metric)=1608, Current Rating=600mA, DC Resistance (DCR)=350mR, Max Operating Temperature=125°C, Min Operating Temperature=-55°C, Package Quantity=1, Test Frequency=100MHz, Tolerance=25%, Case/Package=0603, Core Material=Ferrite, DC Current=600mA, Depth=0.8mm, Height=0.8mm, Impedance=1kR, Lead Free="Lead Free", Length=1.6mm, Material=Steel, Max Current Rating=600mA, Max DC Current=600mA, Military Standard=Not, Number of Circuits=1, Number of Lines=1, Number of Pins=2, Packaging="Tape and Reel", Radiation Hardening=No, REACH SVHC="No SVHC", Termination=SMD/SMT, Width=0.8mm
IC2: "Integrated Circuit", Manufacturer_Name="Cypress Semiconductor", Mouser Part Number=727-CY8C6347BZIBLD54, Arrow Part Number=CY8C6347BZI-BLD54, Arrow Price/Stock=https://www.arrow.com/en/products/cy8c6347bzi-bld54/cypress-semiconductor, Datasheet Link=https://www.arrow.com/en/products/cy8c6347bzi-bld54/cypress-semiconductor, Height=1mm, Manufacturer_Part_Number=CY8C6347BZI-BLD54, Mouser Price/Stock=https://www.mouser.co.uk/ProductDetail/Cypress-Semiconductor/CY8C6347BZI-BLD54/?qs=XeJtXLiO41TbiRPpjrRqiA%3D%3D
J1 J2: library part ZF5S-10-01-X-WT, "ZERO INSERTION FORCE 0.5MM ASSEMBLY, 01 LEAD STYLE.", Manufacturer=SAMTEC, CREATED="January 30, 2015 - Wendy Xin", PCB DECAL=ZF5S-10-01-X-WT
J3: library part CMP-2000-05643-1, "USB Connector, 30 V, 1 A, 0 to 50 degC, 5-Pin SMD, RoHS, Tape and Reel", Color=Gray, Current Rating=1A, Flammability Rating=UL94V-0, Insulation Resistance=100MOhms, Manufacturer=Molex, Operating Temperature Range=0Cto+50C, Package Description="5-Pin Surface Mount Device, Body 9.9 x 9 mm, Pitch 0.8 mm", Voltage Rating=30VAC/DC, Brand=Molex, Connector Type=MiniUSBTypeABReceptacle, Contact Material=CopperAlloy, Contact Plating=Gold, Datasheet URL=http://www.molex.com/pdm_docs/sd/565790576_sd.pdf, Datasheet Version="Rev. E, 04/2006", Factory Pack Quantity=800, Features=MetalshieldingforESDprotection, Gender=Female, Manufacturer URL=http://www.molex.com/, Mounting Angle=Right, Mounting Technology=SurfaceMount, Number of Contacts=5Contact, Number of Ports=1Port, Package Reference=56579-0576, Packaging=Reel, Product=MiniUSBTypeABConnectors, Product Category=USBConnectors, RoHS=Details, Series=56579, Standard=USB, Termination Style=SolderTab
L1: library part CMP-06042-016317-1, "Multilayer Type Inductor for Power Lines, 0805 (2012), 2.2μH, 30%, 0.288Ω, 0.8A", Case Code (Imperial)=0805, Case Code (Metric)=2012, Current Rating=800mA, DC Resistance (DCR)=288mR, Inductance Tolerance=30%, Max Operating Temperature=125°C, Min Operating Temperature=-55°C, Package Quantity=4000, Self Resonant Frequency=40MHz, Test Frequency=1MHz, Case/Package=0805, Core Material=Ferrite, DC Current=800mA, Depth=1.4mm, Height=0.9mm, Height - Seated (Max)=0.039inch, Inductance=2.2uH, Lead Free="Lead Free", Length=2mm, Max DC Current=800mA, Military Standard=Not, Mount="Surface Mount", Packaging="Tape and Reel", Radiation Hardening=No, REACH SVHC="No SVHC", RoHS Compliant=Yes, Series=LQM, Shielding=Shielded, Termination=SMD/SMT, Tolerance=30%, Width=0.049inch
L1_BLE: library part CMP-06042-013213-1, "Film type RF Inductor 2.7nH ±0.1nH 500mA 0.2Ω 0201 (0603)", Case Code (Imperial)=0201, Case Code (Metric)=0603, Current=350mA, Current Rating=500mA, DC Resistance (DCR)=200mR, Max Operating Temperature=125°C, Min Operating Temperature=-55°C, Package Quantity=15000, Resistor Type="Thin Film", Self Resonant Frequency=6GHz, Test Frequency=500MHz, Tolerance=3%, Case/Package=0201, Core Material=Non-Magnetic, DC Current=500mA, Depth=0.33mm, Height=0.3mm, Height - Seated (Max)=0.013inch, Inductance=2.7nH, Lead Free="Lead Free", Length=0.024inch, Max DC Current=500mA, Military Standard=Not, Mount="Surface Mount", Packaging="Tape and Reel", Q Factor=14, Radiation Hardening=No, REACH SVHC="No SVHC", Shielding=Unshielded, Termination=SMD/SMT, Width=0.3mm
L2_BLE: library part CMP-06042-009861-1, "Multilayer type RF Inductor 3.3nH ±0.3nH 0.12Ω 1000mA 0603", Case Code (Imperial)=0603, Case Code (Metric)=1608, Current Rating=500mA, DC Resistance (DCR)=150mR, Max Operating Temperature=85°C, Min Operating Temperature=-55°C, Package Quantity=4000, Self Resonant Frequency=6GHz, Test Frequency=100MHz, Case/Package=0603, Core Material=Air, DC Current=500mA, Depth=0.95mm, Height=0.8mm, Height - Seated (Max)=0.037inch, Inductance=3.3nH, Lead Free="Lead Free", Length=1.6mm, Max DC Current=500mA, Military Standard=Not, Mount="Surface Mount", Packaging="Tape and Reel", Q Factor=12, Radiation Hardening=No, REACH SVHC="No SVHC", Shielding=Unshielded, Termination=SMD/SMT, Width=0.8mm
LED: library part CMP-22017-000005-2, "LED GREEN CLEAR CHIP SMD", Case Code (Imperial)=0603, Case Code (Metric)=1608, Color=Green, Forward Current=30mA, Forward Voltage=2.1V, Lens Color=Colorless, Max Operating Temperature=85°C, Min Operating Temperature=-55°C, Package Quantity=1, Power Dissipation=100mW, Reverse Voltage=5V, Test Current=10mA, Voltage=2V, Case/Package=0603, Depth=0.8mm, Dominant Wavelength=569nm, Height=0.8mm, Illumination Color=Green, Lead Free="Lead Free", Length=1.6mm, Lens Style=Clear, Lens Transparency=Clear, Luminous Intensity=6mcd, Mount="Surface Mount", Number of Elements=1, Number of LEDs=1, Number of Pins=2, Packaging="Tape and Reel", Power Rating=100mW, Radiation Hardening=No, Viewing Angle=130°, Wavelength=565nm, Width=0.8mm
P1: library part CMP-2000-05352-1, "Male Header, Pitch 1.27 mm, 2 x 5 Position, Height 6.12 mm, RoHS, Tube", Color=Black, Manufacturer=Samtec, Package Description="Male Header, Pitch 1.27 mm, 2 x 5 Position, Height 5.97 mm, Tail Length 4.32 mm", Package Reference=FTSH-105-01-L-DV-K, Category=Connectors,Interconnects, Connector Type=Header,Shrouded, Contact Finish=Gold, Contact Finish Thickness=3µin(0.08µm), Contact Mating Length="0.120\"(3.05mm)", Contact Type=MalePin, Datasheet URL=http://suddendocs.samtec.com/prints/ftsh-1xx-xx-xxx-dv-xxx-mkt.pdf, Datasheet Version="Rev. ET, 10/1995", Family=RectangularConnectors-Headers,MalePins, Fastening Type=-, Features=-, Manufacturer URL=http://www.samtec.com/, Mounting Type=SurfaceMount, Number of Positions=10, Number of Positions Loaded=All, Number of Rows=2, Package URL=http://suddendocs.samtec.com/prints/ftsh-1xx-xx-xxx-dv-xxx-footprint.pdf, Packaging=Tube, Pitch="0.050\"(1.27mm)", Row Spacing="0.050\"(1.27mm)", Series=FTSH, Termination=Solder
R1 R3 R4 R5 R6: library part CMP-2002-07353-1, Manufacturer="Yageo / Phycomp", Part Number=RC0402FR-0710KL
R2 R7 R8: library part CMP-2002-01154-4, "Chip Resistor, 4.7 KOhm, +/- 1%, 0.1 W, -55 to 155 degC, 0402 (1005 Metric), RoHS, Tape and Reel", Case Code (Imperial)=0402, Case Code (Metric)=1005, Max Operating Temperature="155 degC", Min Operating Temperature="-55 degC", Package Quantity=1, PartNumber=ERJ-2RKF4701X, Power Rating="100 mW", Resistance="4.7 KOhm", Tolerance=1%, Voltage Rating="50 V", Case\/Package=0402, ComponentLink1Description="Manufacturer URL", ComponentLink1URL=http://www.panasonic.com/, ComponentLink2Description=Datasheet, ComponentLink2URL=http://industrial.panasonic.com/cdbs/www-data/pdf/RDA0000/AOA0000C86.pdf, DatasheetVersion=04/2015, Height="0.35 mm", Length="1 mm", Mount="Surface Mount", Mounting Technology="Surface Mount", PackageDescription="2-Pin Surface Mount Device, Body 1 x 0.5 mm", PackageReference=0402, Packaging="Cut Tape", Pins=2, Radiation Hardening=No, REACH SVHC=Yes, RoHSCompliant=true, Width="0.5 mm"
R11: library part CMP-2001-03755-2, "RES Thick Film, 2kΩ, 1%, 0.125W, 100ppm/°C, 0805", Case Code (Imperial)=0805, Case Code (Metric)=2012, Max Operating Temperature=155°C, Max Power Dissipation=125mW, Min Operating Temperature=-55°C, Package Quantity=10, Resistance=2kR, Temperature Coefficient=100ppm/°C, Tolerance=1%, Voltage Rating=150V, Case/Package=0805, Composition="Thick Film", Contact Plating=Tin, Depth=1.25mm, Features="Automotive AEC-Q200", Height=0.02inch, Lead Free="Lead Free", Length=2mm, Military Standard=Not, Mount="Surface Mount", Number of Pins=2, Number of Terminals=2, Number of Terminations=2, Packaging="Tape and Reel", Power Rating=125mW, Radiation Hardening=No, Termination=SMD/SMT, Voltage Rating (DC)=150V, Weight=0.000194oz, Width=1.25mm, Working Voltage=150V
R30 R31: library part CMP-2002-00022-2, "RES Thick Film, 470Ω, 1%, 0.063W, 100ppm/°C, 0402", Case Code (Imperial)=0402, Case Code (Metric)=1005, Max Operating Temperature=155°C, Max Power Dissipation=63mW, Min Operating Temperature=-55°C, Package Quantity=10, Resistance=470R, Temperature Coefficient=100ppm/°C, Tolerance=1%, Voltage Rating=50V, Case/Package=0402, Composition="Thick Film", Contact Plating=Tin, Depth=0.5mm, Features="Automotive AEC-Q200", Height=0.35mm, Lead Free="Lead Free", Length=1mm, Military Standard=Not, Mount="Surface Mount", Number of Terminations=2, Packaging="Tape and Reel", Power Rating=63mW, Radiation Hardening=No, Termination=SMD/SMT, Voltage Rating (DC)=50V, Weight=2.3E-05oz, Width=0.5mm
RESET: library part CMP-2100-03586-2, "SWITCH TACTILE SPST-NO 0.05A 12V", Contact Current Rating=50mA, Contact Resistance=100mR, Insulation Resistance=100MR, Max Operating Temperature=70°C, Max Voltage Rating (DC)=12V, Min Operating Temperature=-25°C, Operating Force=1.5N, Package Quantity=1, Ratings="Dust Proof", Actuator Length=0.4mm, Actuator Type=Standard, Contact Material=Silver, Current Rating=50mA, Depth=2.5mm, Electrical Life=200000Cycles, Height=1.2mm, Illumination Type=Non-Illuminated, Lead Free="Lead Free", Length=4mm, Max Current Rating=50mA, Mechanical Life=200000Cycles, Mount="Surface Mount", Orientation=Straight, Packaging="Tape and Reel", Switch Function=Off-Mom, Switch Travel=0.15mm, Termination=SMD/SMT, Throw Configuration=SPST, Voltage Rating (DC)=12V, Weight=0.000776oz, Width=3mm
SD: library part CMP-2000-05825-1, "Micro SD Card, RA, -25 to 85 degC, 8-Pin SMD, RoHS, Tape and Reel", Current Rating=500mA, Manufacturer=Molex, Package Description="8-Pin Surface Mount Device, Body 11.95 x 11.4 mm, Pitch 1.1 mm", Voltage Rating=10VAC/DC, Brand=Molex, Card Type=microSD, Contact Material=PhosphorBronze, Contact Plating=Gold, Datasheet URL=http://www.molex.com/pdm_docs/sd/1040310811_sd.pdf, Datasheet Version="Rev. E, 04/2006", Height=1.42mm, Housing Material=LiquidCrystalPolymer(LCP), Insertion - Extraction Style=Push-Pull, Length=11.4mm, Manufacturer URL=http://www.molex.com/, Mating Cycles=10000, Mounting Technology=SurfaceMount, Mounting Type=Standard, Number of Contacts=8, Number of Rows=1Row, Orientation=RightAngle, Package Reference=104031-0811, Packaging=Reel, Pitch=1.1mm, Product=CardConnectors, Product Category=MemoryCardConnectors, RoHS=True, Series=104031, Termination Style=SMD
SD_LED: library part CMP-02520-000012-1, "LED RED 0603 SMD", Ambient Temperature Range High=+85°C, Ambient Temperature Range Low=-35°C, Colour=Red, Forward Current=20mA, Forward Voltage=2V, Manufacturer=Vishay, Manufacturer Part Number=VLMS1300-GS08, Package=6.541-5092.01-4, Power Dissipation=75mW, Reverse Voltage=5V, Temperature="-35°C to +85°C", Automotive=No, Category=Diode, ComponentLink2Description=Datasheet, ComponentLink2URL=http://www.vishay.com/docs/82437/vlmo1300.pdf, Device Class L1=Optoelectronics, Device Class L2=LEDs, Device Class L3=unset, Digikey Description="LED RED 0603 SMD", Height=1mm, Lead Free=Yes, Led Orientation="Top View", Luminous Intensity=54mcd, Mouser Description="Standard LEDs - SMD Super Red Clear Non-Diff", Octopart=https://octopart.com/vlms1300-gs08-vishay-21709201, Peak Emmision Wavelength=639nm, RoHS=TRUE, Temperature Range High=+85°C, Temperature Range Low=-35°C, Viewing Angle=130°, Wavelength=631nm
U1: library part CMP-0786-00152-1, "High Accuracy, Ultralow IQ, 1 A, anyCAP(R) Low Dropout Regulator, 2.7 to 8 V Vin, 3.3 V Vout, Industrial, 3-pin SOT223 (KC-3), Reel", Manufacturer="Analog Devices", Preset Vout Values (V)=3.3, Supply Current IGND @ Small Load=110uA, Code_JEDEC=TO-261-AA, ComponentLink1Description="Manufacturer URL", ComponentLink1URL=http://www.analog.com/en/index.html, ComponentLink2Description=Datasheet, ComponentLink2URL=http://www.analog.com/static/imported-files/data_sheets/ADP3338.pdf, ComponentLink3Description="Package Specification", ComponentLink3URL=http:/www.analog.com/static/imported-files/packages/PKG_PDF/SOT_223(KC)/KC_3.pdf, ComponentLink4Description="URL Link1", ComponentLink4URL="Product URL:http://www.analog.com/en/ADP3338/productSearch.html", DatasheetVersion="Rev. B", Iout max=1A, Mounting Technology="Surface Mount", PackageDescription="3-Pin Small Outline Transistor Package, Body 3.5 x 6.5 mm, Pitch 2.3 mm", PackageReference=KC-3, PackageVersion="11-20-2012-B, 11/2012", Packing=Reel, PartNumber=ADP3338AKCZ-3.3-RL, Vin (max) (V)=8, Vin (min) (V)=2.7

## Free pads (board coordinates)
  round 106.3 hole 94.49: 30(1266,3678) 30(2604,3678) 31(2602,5352)

## Via types
v1: diameter 23.62, hole 16, Top Layer to Bottom Layer, 26 vias
v2: diameter 23.62, hole 15.75, Top Layer to Layer 2, 14 vias
v3: diameter 23.62, hole 15.75, Top Layer to Bottom Layer, 14 vias
v4: diameter 14.96, hole 9.84, Top Layer to Bottom Layer, tented both sides, 13 vias
v5: diameter 14.96, hole 9.84, Top Layer to Layer 2, tented both sides, 10 vias
v6: diameter 14.96, hole 9.84, Top Layer to Layer 1, tented both sides, 10 vias
v7: diameter 23.62, hole 16, Top Layer to Layer 1, 1 vias

## Nets (pads, with @x,y where several pads share a name; then routed paths per layer and width w, separated by ;. In a path a pad name is that pad's centre, name@x,y a point inside that pad or via, vN(x,y) a via of type N, cw(c..) or ccw(c..) an arc to the next point about the centre after c; other vN are vias at no path point)
DVDD: C14.1 IC2.F2 IC2.G3 | length 152.1
  Top Layer w7: v4(1594,4892) 1594.23,4892 1607,4879.23 IC2.F2 IC2.G3
  Bottom Layer w7: v4(1594,4892) 1620,4866 1620,4807.46 C14.1
GND: BLE.1 C1.1 C2.2 C3.1 C4.1 C5.1 C6.1 C7.1 C10.1 C11.2 C12.2 C13.2 C14.2 C15.2 C16.2 C17.1 C21.1 C22.2 C30.2 C31.2 IC2.A1 IC2.B1 IC2.B2 IC2.C3 IC2.C11 IC2.D1 IC2.D4 IC2.D10 IC2.E3 IC2.G2 IC2.K4 IC2.K10 IC2.M12 J1.2 J1.4 J1.6 J1.8 J1.10 J2.2 J2.4 J2.6 J2.7 J2.8 J2.9 J2.10 J3.4 J3.5 J3.6 J3.7 J3.8 J3.9 L1_BLE.2 LED.1 P1.3 P1.5 P1.6 P1.7 P1.8 P1.9 RESET.2 SD.6 SD.11 SD.12 SD_LED.1 U1.1 | length 253.4
  Top Layer w5: v6(1568,4994) 1568.61,4994 1581.02,4981.59 IC2.B1@1581.64,4982.2 ; IC2.D1 1581.64,4929.21 1591.25,4919.6 v6(1591.25,4917.87) ; IC2.A1 1592.36,4996.46 1592.36,4992.31 ; IC2.B1@1582.84,4981.59 IC2.B1 1592.36,4992.31 ; v6(1594,4866) 1594.43,4866 1606.8,4853.64 IC2.G2 ; IC2.B2 1596.5,4992.31 1592.36,4992.31 ; IC2.E3 IC2.D4 1658,4930.41 1646.41,4942 v6(1646,4942) 1646,4942.41 1632.82,4955.59 IC2.C3 ; IC2.C11 1837.77,4956 1849.77,4968 v6(1850,4968) ; IC2.M12 1875.24,4713.58 v6(1875.39,4713.58)
  Top Layer w8: LED.1@1881.75,4308.81 LED.1 ; C2.2 C2.2@1999.86,4506.29 ; C22.2 2152,5025.71 C22.2@2167.92,5009.78 ; C5.1 C5.1@2190,4846.61
  other v1: 1386,3692 1282,3852 2392,3864 1482,3928 2581.65,4020.49 1844,4106 1286,4114 1801.54,4237 1650,4244 1660,4356 1542,4370 2188,4372 1286,4390 1596,4448 2299.65,4451.51 1428,4520 1998,4666 1289,4699 2115,4719 2201,4761 2342,4968 1939.55,5275.77 2166,5278 2392,5352 1652,5390
  other v6: 1736,4805.85 1668,4852 1806.16,4853.6 1736,4901.85
  other v7: 1630,5104
IMU_CS: IC2.C7 J1.9 TP9.TP? | length 1171.6
  Top Layer w7: IC2.C7@1735.59,4956 IC2.C7 1735.18,4955.41 1762,4928.59 v5(1762,4928)
  Top Layer w8: v2(2338,4490) 2422,4406 2596,4406 2606.49,4395.51 2606.49,4388.63 TP9.TP?@2615.87,4379.25
  Layer 2 w7: v5(1762,4928) 1788,4902 1788,4822 1968.41,4641.59
  Layer 2 w8: 1968.41,4641.59 2120,4490 v2(2338,4490)
IMU_MISO: IC2.C8 J1.5 | length 693.2
  Top Layer w7: IC2.C8 1760.77,4955.59 1787.96,4928.41 v5(1787.96,4928)
  Top Layer w8: v2(2318.16,4666.16) v2@2319.09,4665.23
  Layer 2 w7: v5(1787.96,4928) 1806.68,4909.28 1806.68,4885.5 1937.87,4754.31 1968.41,4754.31
  Layer 2 w8: 1968.41,4754.31 1994.19,4754.31 2082.34,4666.16 v2(2318.16,4666.16)
IMU_MOSI: IC2.A9 J1.3 | length 938.2
  Top Layer w7: IC2.A9 1786.36,5066.86 1796.33,5076.82
  Top Layer w8: 1796.33,5076.82 1815.5,5095.99 v2(1844.16,5095.99)
  Layer 2 w8: v2(1844.16,5095.99) 2168.01,5095.99 2368,4896 2368,4776 v2(2310,4718)
IMU_SCLK: IC2.B8 J1.7 | length 676.6
  Top Layer w5: IC2.B8 1760.77,4982.18 1772,4993.41 v5(1772,4994)
  Layer 2 w5: v5(1772,4994) 1772,5042 1804,5074 1968.41,5074
  Layer 2 w8: 1968.41,5074 2144,5074 v2(2304,4914)
NetANT_1: ANT.1 L2_BLE.1 | length 107.3
  Top Layer w20: L2_BLE.1 ANT.1@1336,5213.32
NetBLE_2: BLE.2 R30.2 | length 86.6
  Top Layer w15: BLE.2 2581,5189.47 2581,5105.67 R30.2
NetC1_BLE_1: C1_BLE.1 IC2.C1 | length 113.6
  Top Layer w20: C1_BLE.1@1468,4956 IC2.C1
NetC1_BLE_2: C1_BLE.2 L1_BLE.1 L2_BLE.2 | length 259.4
  Top Layer w20: L2_BLE.2 1336,4982 1362,4956 C1_BLE.2@1425.41,4956 ; L1_BLE.1 1422,4959.41 C1_BLE.2@1425.41,4956 ; C1_BLE.2 C1_BLE.2@1425.41,4956
NetC6_2: C6.2 IC2.N12 | length 182.6
  Top Layer w7: 1855.07,4632.82 1863.13,4640.88 IC2.N12
  Top Layer w8: C6.2 1790,4567.75 1855.07,4632.82
NetC16_1: C16.1 IC2.B5 L1.1 | length 875.4
  Top Layer w5: IC2.B5 1684,4981.8 1696,4993.8 v4(1696,4994)
  Top Layer w8: L1.1 2048,5270 C16.1 2049.13,5206.87 2104.87,5206.87 v3(2106,5208)
  Bottom Layer w5: v4(1696,4994) 1696,5076.82
  Bottom Layer w8: 1696,5076.82 1696,5224 1792,5320 2004,5320 2106,5218 v3(2106,5208)
NetC17_2: C17.2 IC2.B13 IC2.C4 | length 315
  Top Layer w5: IC2.B13 1901.13,4994 v4(1904,4994)
  Top Layer w7: IC2.C4 1658.41,4956.2 1670,4967.8 v4(1670,4968)
  Bottom Layer w5: C17.2 1752,5000 1766,5014 1884,5014 v4(1904,4994)
  Bottom Layer w7: v4(1670,4968) 1748,4968 C17.2
NetIC2_A3: IC2.A3 J3.2 | length 1728.2
  Top Layer w7: v5(1600,5040) IC2.A3
  Top Layer w8: v2(2276,4044) 2313.6,4006.4 J3.2
  Layer 2 w7: v5(1600,5040) 1628,5068 1692,5068 1752,5008 1752,4941.31 1746.02,4935.33 1746.02,4920.67 1752,4914.69 1752,4632.82
  Layer 2 w8: 1752,4632.82 1752,4232 1840,4144 2176,4144 v2(2276,4044)
NetIC2_B3: IC2.B3 J3.3 TP6.TP? | length 1858.1
  Top Layer w7: v5(1620,4994) 1620.2,4994 1632.61,4981.59 IC2.B3
  Top Layer w8: TP6.TP? 2130,4122 2216.99,4035.01 2232.89,4035.01 2270.45,3997.45 2270.45,3995.12 2282.1,3983.46 J3.3
  Layer 2 w7: v5(1620,4994) 1620,5032 1638,5050 1670,5050 1714,5006 1714,4632.82
  Layer 2 w8: 1714,4632.82 1714,4176 1852,4038 v2(2214,4038)
NetIC2_B4: IC2.B4 L1.2 | length 915.4
  Top Layer w5: IC2.B4 1658.41,4982 1670,4993.59 v4(1670,4994)
  Top Layer w8: L1.2 2113.17,5329.17 v3(2140,5356)
  Bottom Layer w5: v4(1670,4994) 1670,5076.82
  Bottom Layer w8: 1670,5076.82 1670,5254 1802,5386 2110,5386 v3(2140,5356)
NetIC2_G11: IC2.G11 R31.1 | length 851
  Top Layer w7: IC2.G11 1837.54,4853.81 1849.17,4865.44 v4(1849.17,4865.61)
  Top Layer w8: R31.1@2471.34,5054.67 R31.1 R31.1@2471.34,5054.67
  Top Layer w15: R31.1 2481,5062.33 2481,4963 v3(2482,4962)
  Bottom Layer w7: v4(1849.17,4865.61) 1968.41,4984.85
  Bottom Layer w15: 1968.41,4984.85 1987.55,5004 2440,5004 v3(2482,4962)
NetIC2_G12: IC2.G12 R30.1 | length 875.7
  Top Layer w7: IC2.G12 1863.13,4853.25 1876,4840.39 v4(1876,4840)
  Top Layer w15: v3(2580,4962) 2581,4963 2581,5062.33 R30.1
  Bottom Layer w7: v4(1876,4840) 1968.41,4840
  Bottom Layer w15: 1968.41,4840 1998.41,4870 2488,4870 v3(2580,4962)
NetIC2_M1: IC2.M1 P1.2 TP11.TP? | length 2289.1
  Top Layer w7: 1518.41,4702.01 1557.96,4702.01 IC2.M1
  Top Layer w10: 1518.41,4702.01 1406.01,4702.01 1380,4676 1380,3818 1564,3634 1908,3634 1996,3722 1996,3928 1960,3964 P1.2@1845.12,3964 ; P1.2 P1.2@1845.12,3964 ; TP11.TP? 1854.69,4010.69 1854.69,3973.57 P1.2@1845.12,3964
NetIC2_N2: IC2.N2 P1.4 | length 1850.3
  Top Layer w7: IC2.N2 1649.81,4657.51 1649.81,4632.82
  Top Layer w8: 1649.81,4632.82 1649.81,4592.87 1440,4383.06 1440,3832 1596,3676 1878,3676 1958,3756 1958,3866 1910,3914 P1.4
NetLED_2: LED.2 R11.1 | length 114.8
  Top Layer w15: LED.2 1949.45,4317.45 2053.11,4317.45 R11.1
NetR4_1: R4.1 SD.8 | length 181.4
  Bottom Layer w15: SD.8 2457.1,3665.36 2457.1,3729.1 2491.24,3763.24 R4.1
NetR6_1: R6.1 SD.1 | length 187.7
  Bottom Layer w8: R6.1@1993.53,3712.76 R6.1 2114.06,3711.24 2155.46,3669.83 SD.1
NetR7_1: R7.1 SD.9 | length 116.8
  Bottom Layer w8: R7.1 2002.64,3983.11 2003,3983.11 2032.1,3954.01 2032.1,3922.72 2047.78,3907.04 SD.9
NetR8_1: R8.1 SD.10 | length 89.7
  Bottom Layer w8: R8.1 2046,4058.43 SD.10
NetR31_2: R31.2 SD_LED.2 | length 85.5
  Top Layer w15: SD_LED.2 2478,5186.47 2478,5106.67 R31.2
PPG_SCLK: IC2.M11 J2.5 | length 882.6
  Top Layer w7: IC2.M11 1837.54,4725.02 1849.48,4713.09 v4(1849.48,4711.97)
  Bottom Layer w7: 1596.68,4632.82 1596.68,4666.16 1606.51,4676 1840,4676 1849.48,4685.48 v4(1849.48,4711.97) ; 1926.13,4632.82 1953.98,4660.67 1953.98,4734.14 1968.41,4748.57
  Bottom Layer w8: 1596.68,4632.82 1596.68,4622.73 1611.4,4608 1901.31,4608 1926.13,4632.82 ; 1968.41,4748.57 2006.65,4786.81
PPG_SDA: IC2.L13 J2.3 TP5.TP? | length 603.3
  Top Layer w7: IC2.L13 1912,4728 1968.41,4728
  Top Layer w8: 1968.41,4728 v3(1984,4728)
  Bottom Layer w8: v3(1984,4728) 2088,4624 ; TP5.TP? 2114.9,4545.1 2088,4572 2088,4624 ; 2278.62,4696.75 2205.87,4624 2088,4624
RST: IC2.A8 P1.10 R2.1 RESET.1 | length 2611.9
  Top Layer w7: 1749.18,5076.82 1760.77,5065.23 ; IC2.A8 1760.77,5065.23 ; 1772.36,5076.82 1760.77,5065.23
  Top Layer w8: v2(1562,3788) 1562,3752 1600,3714 1776,3714 1804.12,3742.12 1804.12,3753.43 1814.69,3764 P1.10 ; v2(1722,5104) 1749.18,5076.82 ; 1772.36,5076.82 1777.74,5082.2 1777.74,5104.83 1794.72,5121.8 1868.81,5121.8 cw(c1872,5096.19) 1869.92,5121.92 1903.75,5155.75 R2.1@1938.11,5155.75 ; R2.1 1952.64,5145.11 1953,5145.11 1958.11,5140 2192,5140 2244.54,5192.54 2244.54,5231.18 2256.28,5242.93 RESET.1
  Layer 2 w7: 1518.41,5016.41 1578.82,5076.82
  Layer 2 w8: 1518.41,5016.41 1476.19,4974.19 1476.19,4089.86 1562,4004.05 v2(1562,3788) ; 1578.82,5076.82 1606,5104 v2(1722,5104)
SD_CLK: IC2.N9 SD.5 | length 2260.4
  Top Layer w7: 1746.82,4632.82 1786.36,4672.36 IC2.N9
  Top Layer w8: v3(1518.84,4160.13) 1518.84,4113.16 1541.21,4090.79 1666.79,4090.79 1702,4126 1702,4442 1634.04,4509.96 1634.04,4551.64 1676.22,4593.82 1707.82,4593.82 1746.82,4632.82
  Bottom Layer w8: v3(1518.84,4160.13) 1518.84,3739.16 1643.62,3614.38 2310.86,3614.38 2328.69,3632.21 SD.5
SD_CS: IC2.L8 R5.1 SD.2 | length 1985.3
  Top Layer w7: IC2.L8 1772.04,4740 1772.04,4737.15 v4(1773.57,4735.63)
  Top Layer w8: v3(2168,3778) 2252,3778 v3(2312,3838)
  Bottom Layer w7: 1518.41,4694.41 1559.63,4735.63 v4(1773.57,4735.63)
  Bottom Layer w8: 1518.41,4694.41 1488,4664 1488,4604 1910.19,4181.81 1910.19,3921.31 1952.42,3879.08 1983.14,3879.08 1988,3874.22 R5.1 2276.76,3873.24 v3(2312,3838) ; v3(2168,3778) 2186.04,3759.96 2186.04,3677.64 SD.2
SD_MISO_DO: IC2.M9 R3.1 SD.7 | length 1940.7
  Top Layer w7: IC2.M9 v4(1800,4712)
  Bottom Layer w7: 1550,4632.82 1550,4678 1584,4712 v4(1800,4712)
  Bottom Layer w8: 1550,4632.82 1550,4612 1914,4248 2189.53,4248 2546.92,3890.61 2553.14,3890.61 2558,3885.75 2558,3883.78 2553.14,3878.92 2548.84,3878.92 2415.3,3745.38 SD.7
SD_MOSI_DI: IC2.L9 R1.1 SD.3 TP4.TP? | length 2029.3
  Top Layer w7: IC2.L9 1786.54,4751.28 1799.82,4738 v4(1800,4738)
  Bottom Layer w7: 1518.41,4752.41 1528,4762 1775.67,4762 1799.67,4738 v4(1800,4738)
  Bottom Layer w8: 1518.41,4752.41 1460,4694 1460,4308 1945.24,3822.76 ; TP4.TP? 1809.02,3822.76 1945.24,3822.76 ; SD.3 2229.34,3677.64 2229.34,3776.66 2183.24,3822.76 1994,3822.76 R1.1 1993.24,3822.76 1945.24,3822.76
VCC: C3.2 C4.2 C31.1 FB1.1 FB2.2 FB3.1 IC2.A2 J1.1 J2.1 P1.1 R1.2 R3.2 R4.2 R5.2 R6.2 R7.2 R8.2 R11.2 SD.4 TP2.TP? U1.2 | length 9306.1
  Top Layer w7: 1537.59,5076.82 IC2.A2
  Top Layer w15: 1535.44,5078.97 1535.44,5187.95 1550,5202.51 ; C3.2@1550,5222.13 1550,5202.51 ; P1.1@1694.04,3971.07 1686.98,3964 P1.1 1665.76,4031.76 v2(1702,4068) 1822,4188 v1(2206,4188) 2258,4240 2311.23,4240 ; FB1.1 1877.02,4572 1842,4536.98 1842,4472 1874,4440 2043.2,4440 2098,4494.8 2098,4665.13 1988.66,4774.48 1988.66,4981.07 FB2.2@2015.02,5007.43 ; FB2.2 FB2.2@2015.02,5007.43 ; U1.2 2311.23,4240 ; J1.1 2476,4559.85 2575,4658.85 2575,4851.59 2517.8,4908.8 2463.2,4908.8 2406,4966 ; TP2.TP? 2406,5278 2406,5268 ; 1550,5202.51 1580.64,5171.87 1595.63,5171.87 C4.2 1622,5197.5 1622,5278 1654,5310 1736,5310 1786,5260 FB3.1 1828.57,5212.57 1872,5256 1872,5350 1910,5388 2286,5388 2401,5273 2406,5268 ; FB2.2@2015.02,5007.43 1984,5038.44 1984,5077.07 2014.93,5108 2184,5108 2278,5014 ; 2278,5014 2236,4972 v3(2236,4558) 2236,4499.23 2129.44,4392.66 R11.2 2135.44,4310 2226.53,4310 2254,4337.47 C31.1 2259.46,4332.92 2259.46,4291.78 2311.23,4240 ; 2278,5014 2358,5014 2406,4966 ; 2406,4966 2406,5268
  Layer 2 w15: v2(1702,4068) 1756,4068 1890.35,3933.65 1934.35,3933.65 v3(1936,3932) 1936,3792.91 1928.48,3785.39 v3(1928.48,3783.06)
  Bottom Layer w15: v3(1928.48,3783.06) 1970.78,3740.76 R6.2 ; v3(1936,3932) 1962.89,3905.11 1986.64,3905.11 1988,3903.75 R5.2 ; R7.2 1988.64,3965.61 1976.43,3965.61 1967.64,3974.4 1967.64,4093.14 R8.2 2023.64,4149.14 2023.64,4154.45 2057.19,4188 v1(2206,4188) 2273.31,4120.69 2280.34,4120.69 2354,4047.02 2354,3758 2294.61,3698.61 2294.61,3674.14 SD.4 ; R6.2@1991.63,3742.12 1991.63,3790.64 1994,3793.02 R1.2 ; v3(2236,4558) 2357.5,4436.5 2573.21,4436.5 2582,4445.29 2582,4630.15 ; J2.1 2476,4736.15 2582,4630.15 ; R4.2@2561.36,3790.42 2560,3791.78 R4.2 2560,3793.75 2558,3795.75 R3.2 2594.9,3855.24 2617.67,3878 v3(2620,3878) 2620,4592.15 2582,4630.15
VCC_FB2: C5.2 C7.2 C21.2 C22.1 FB2.1 IC2.A10 IC2.A13 IC2.D11 IC2.M4 R2.2 TP3.TP? | length 2562.5
  Top Layer w5: IC2.A13 1940,5058.46 1940,5076.82
  Top Layer w7: v5(1644.96,4740.55) 1644.96,4739.79 1658.41,4726.35 IC2.M4 ; v5(1832,5053.02) 1811.95,5032.97 IC2.A10 1828.77,5024 1871.91,5024 IC2.A13 ; IC2.D11 1837.98,4930.41 1849.57,4942 v5(1850,4942)
  Top Layer w8: v2(1659.85,4540.95) 1812,4388.81 ; TP3.TP? 1786.9,4313.54 1812,4338.64 1812,4388.81 ; 1940,5076.82 R2.2 ; FB2.1 2067.43,5060.57 2084,5044 2084,4984.94 ; C21.2 2045.97,4941.75 2049.84,4945.62 2049.84,4950.78 2084,4984.94 ; v2(2058,4856) 2058.19,4856.19 2085.81,4856.19 2094,4848 2095.96,4848 ; C7.2 2083.97,4796 2087.84,4799.87 2095.96,4807.99 2095.96,4848 ; C7.2@2087.84,4796 2136,4796 2158,4774 2158,4480 2066.81,4388.81 1812,4388.81 ; 2084,4984.94 2102.08,4966.86 2151.57,4966.86 C22.1 2139.39,4953.82 C5.2 2095.96,4848
  Layer 2 w7: 1598.19,4632.82 1598.19,4716.19 1622.55,4740.55 v5(1644.96,4740.55) ; v5(1832,5053.02) 1850,5035.02 v5(1850,4942) 1850,4904 1898,4856 1968.41,4856
  Layer 2 w8: 1598.19,4632.82 1598.19,4599.81 1657.05,4540.95 v2(1659.85,4540.95) ; 1968.41,4856 v2(2058,4856)
VDD: C30.1 J3.1 TP1.TP? U1.3 | length 533.5
  Top Layer w15: C30.1 2256.9,4126 2284.9,4154 2354.42,4154 U1.3 2355.31,4149.45 2345.09,4139.23 J3.1 2347.44,3951.36 2347.44,3985.81 2425.63,4064 TP1.TP?
VDD_NS: C10.2 C11.1 FB3.2 IC2.A5 | length 352.8
  Top Layer w7: 1680,5076.82 1680,5011.57 1684,5007.57 IC2.A5
  Top Layer w8: 1680,5076.82 C11.1@1680,5169.71 ; C11.1 1683.28,5169.71 1693.57,5159.43 FB3.2 1791.17,5154.25 C10.2
VDDA: C1.2 C2.1 FB1.2 IC2.M13 IC2.N13 | length 449.1
  Top Layer w7: IC2.M13@1889.19,4725.22 IC2.M13 1888.72,4725.02 1891.37,4722.38 1891.37,4703.4 1888.72,4700.76 IC2.N13 1956,4632.82
  Top Layer w8: FB1.2 1917.15,4518.85 1960.7,4562.4 1992.83,4562.4 C2.1 2025.22,4565.57 2048,4588.35 C1.2 2042,4616.25 1972.57,4616.25 1956,4632.82
VDDR: C12.1 C13.1 FB4.1 IC2.C2 IC2.D2 IC2.E2 | length 940.5
  Top Layer w7: 1518.41,4648.02 v4(1614.17,4648.02) ; IC2.E2 IC2.D2 IC2.C2 1607.61,4956 1619.61,4968 v4(1620,4968)
  Top Layer w8: FB4.1 1476.57,4659.02 1485.37,4650.22 1488.86,4650.22 1491.06,4648.02 1518.41,4648.02
  Bottom Layer w7: v4(1614.17,4648.02) 1842.02,4648.02 1878,4684 1878,4788.54 1785.17,4881.37 1785.17,4883.34 1769.97,4898.54 C12.1 1763.05,4903.5 C13.1 1664.5,4903.5 1620,4948 v4(1620,4968)
VRef: C15.1 FB4.2 IC2.A4 IC2.F3 | length 1475.4
  Top Layer w7: 1588.38,5076.82 1658.02,5007.18 IC2.A4 1658.41,5007.84 1644,5022.25 v5(1644,5024) ; IC2.F3 1652.07,4898.48 1656.48,4898.48 v5(1658,4900)
  Top Layer w8: FB4.2 1450,4633.43 1471.43,4612 v2(1624,4612) ; v2(1502,4818) 1441.14,4818 1441.14,4824.14 1455.92,4838.93 1462.07,4838.93 1485.81,4862.67 1494.44,4862.67 1501.77,4870 v3(1506,4870) ; v3(1564.75,5099.25) 1565.95,5099.25 1588.38,5076.82
  Layer 2 w7: 1518.41,4818 1575.79,4818 1657.79,4900 v5(1658,4900) ; v5(1644,5024) 1644,4944 1680,4908 1680,4668 1644.82,4632.82
  Layer 2 w8: v2(1502,4818) 1518.41,4818
  Layer 2 w10: v2(1624,4612) 1644.82,4632.82
  Bottom Layer w7: 1518.41,4882.41 1591.31,4955.31 1591.31,5072.69 1587.18,5076.82
  Bottom Layer w8: v3(1564.75,5099.25) 1587.18,5076.82
  Bottom Layer w10: v3(1506,4870) 1518.41,4882.41
pads on no net: ANT.2 IC2.A6 IC2.A7 IC2.A11 IC2.A12 IC2.B6 IC2.B7 IC2.B9 IC2.B10 IC2.B11 IC2.B12 IC2.C5 IC2.C6 IC2.C9 IC2.C10 IC2.C12 IC2.C13 IC2.D3 IC2.D12 IC2.D13 IC2.E1 IC2.E11 IC2.E12 IC2.E13 IC2.F1 IC2.F11 IC2.F12 IC2.F13 IC2.G1 IC2.G13 IC2.H1 IC2.H2 IC2.H3 IC2.H11 IC2.H12 IC2.H13 IC2.J1 IC2.J2 IC2.J3 IC2.J11 IC2.J12 IC2.J13 IC2.K1 IC2.K2 IC2.K3 IC2.K11 IC2.K12 IC2.K13 IC2.L1 IC2.L2 IC2.L3 IC2.L4 IC2.L5 IC2.L6 IC2.L7 IC2.L10 IC2.L11 IC2.L12 IC2.M2 IC2.M3 IC2.M5 IC2.M6 IC2.M7 IC2.M8 IC2.M10 IC2.N1 IC2.N3 IC2.N4 IC2.N5 IC2.N6 IC2.N7 IC2.N8 IC2.N10 IC2.N11 J1.G1 J1.G2 J2.G1 J2.G2 SD.13 SD.14 U1.4
copper on no net: | length 1.1
  Top Layer w5: 1684,4750.7 1684,4751.28
  Top Layer w7: 1684,4750.7 1684,4751.28